# Altium PCB BAILEY.PcbDoc (part 1 of 8)
Units mil, origin at the board's own origin, x right, y up, seen from the top; angles counter-clockwise.
Board outline 4500 x 4000 mil, 4 copper layers (Signal Layer 1, Signal Layer 2, Signal Layer 3, Signal Layer 4), stack 59.904 mil thick; 190 components, 117 nets, 664 pads, 291 vias.
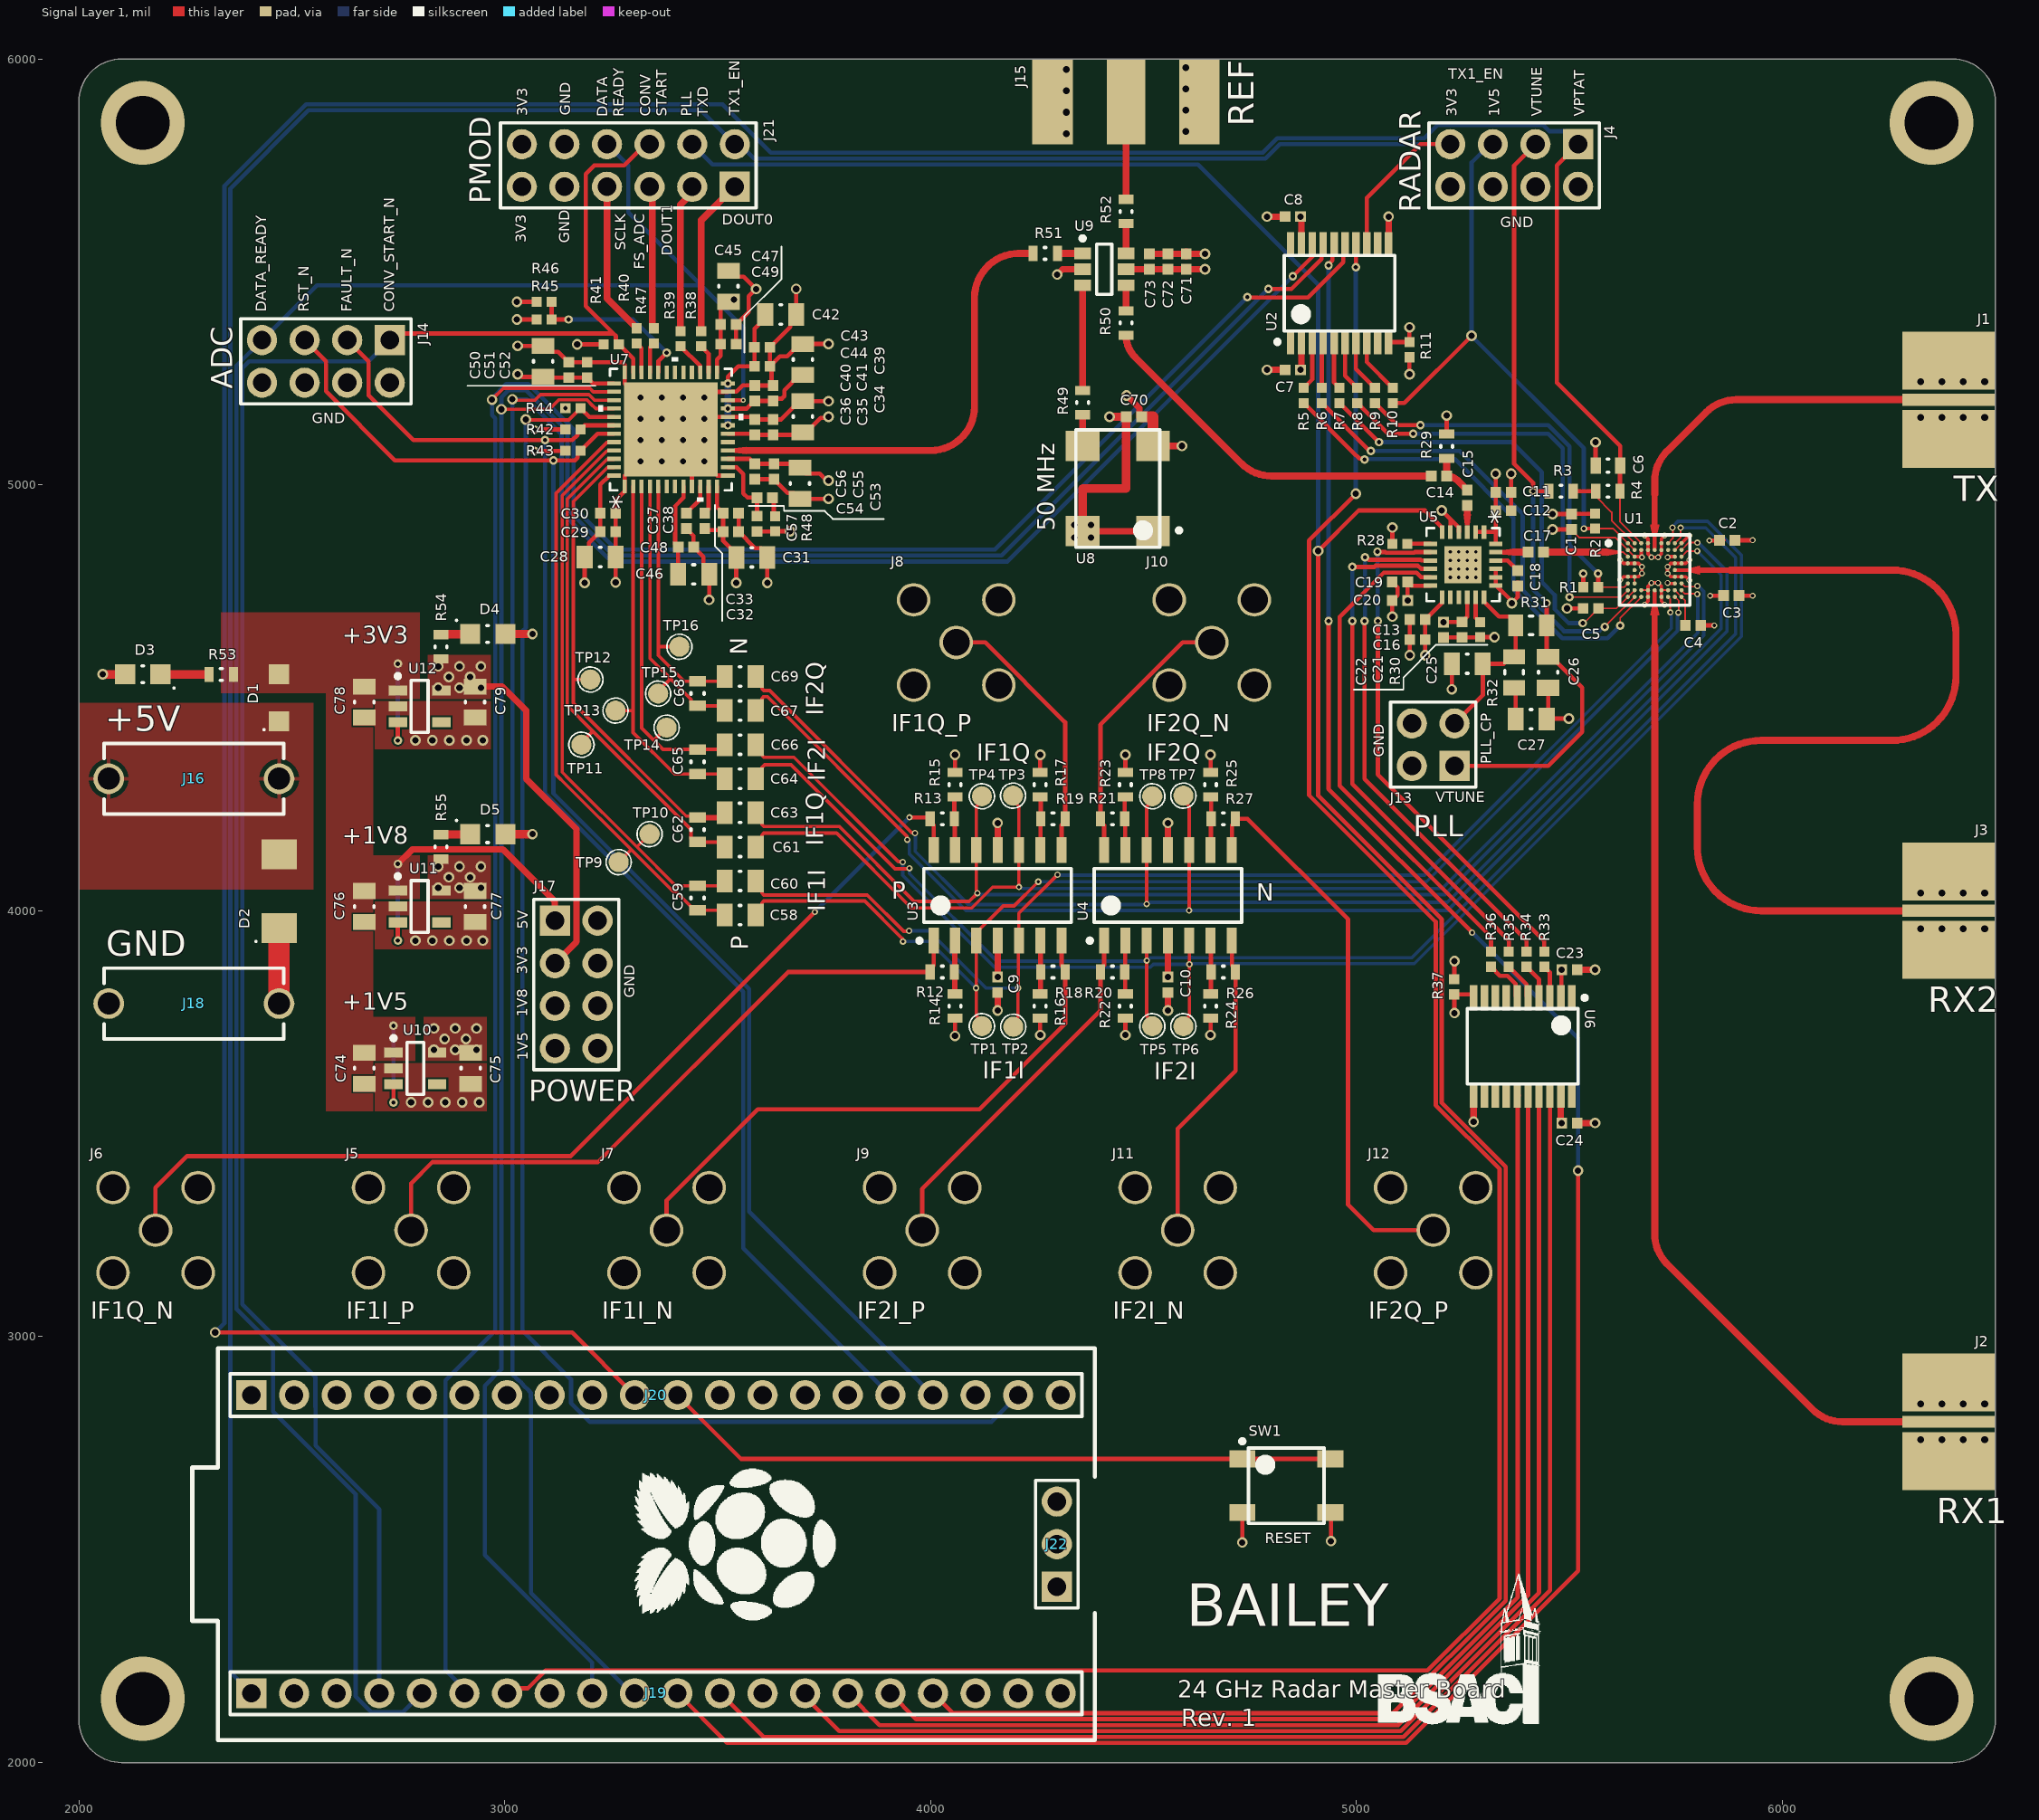
[diagram p0: Signal Layer 1 view]
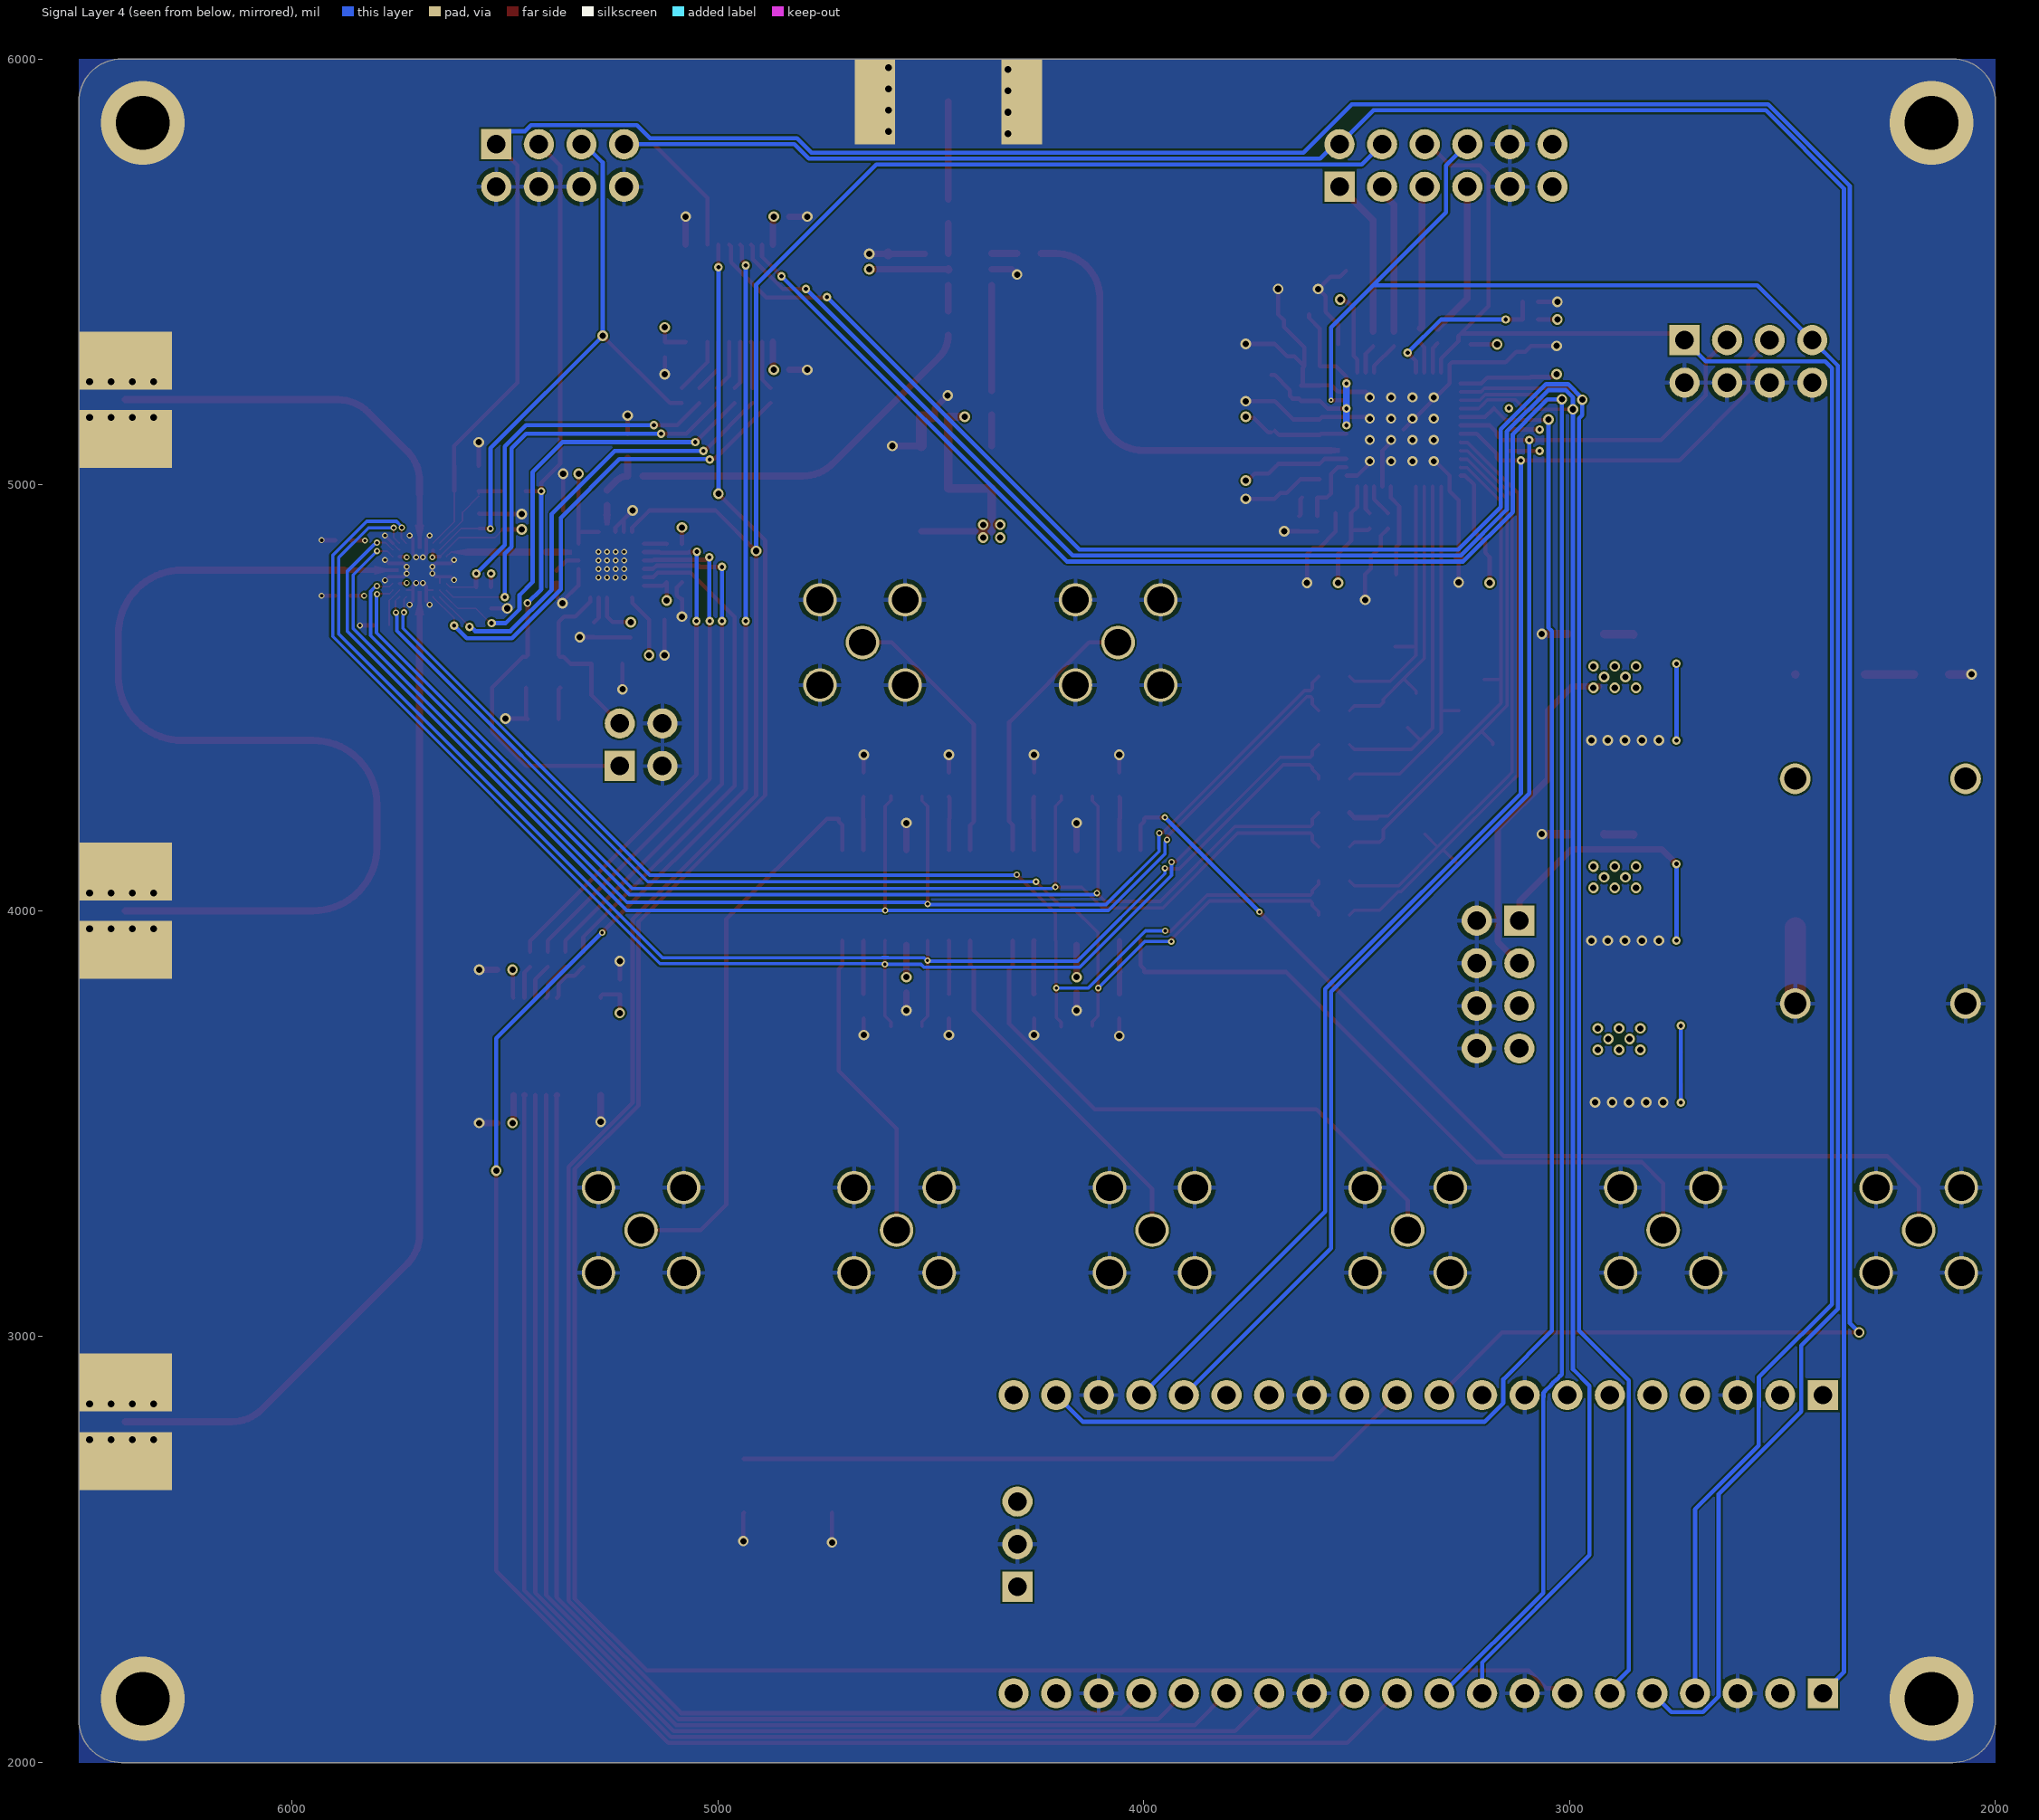
[diagram p1: Signal Layer 4 view, seen from below]
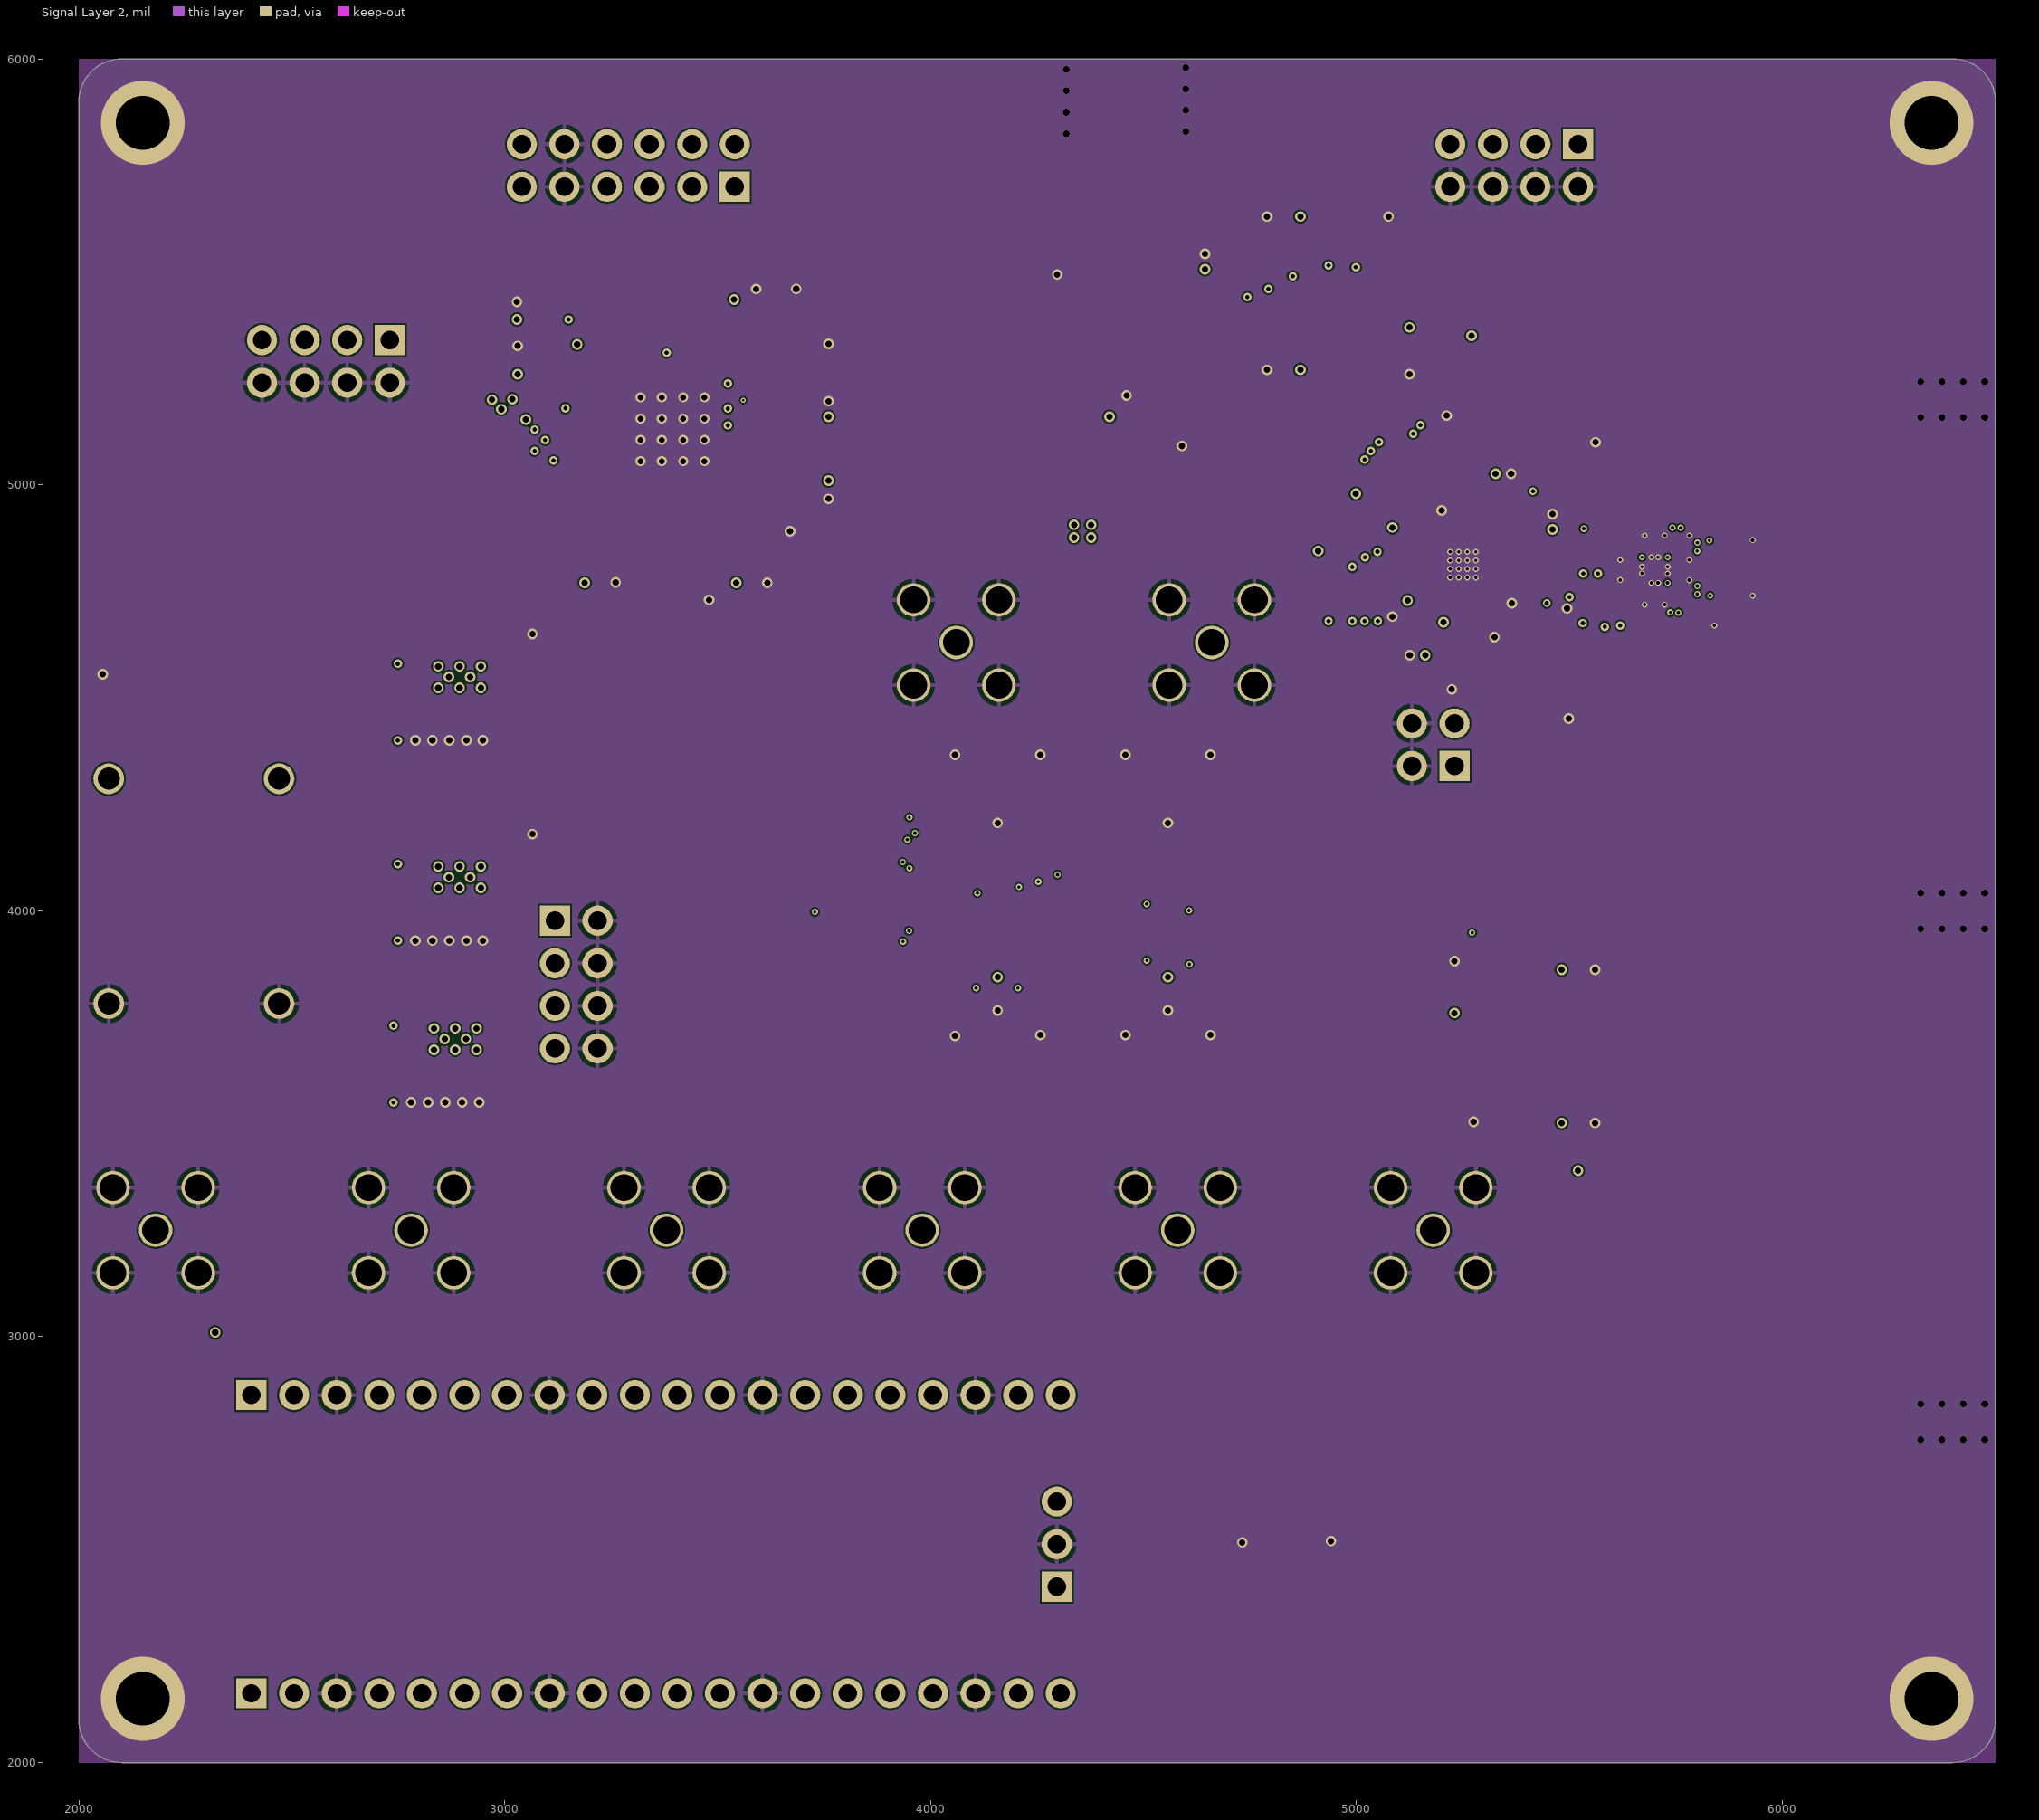
[diagram p2: Signal Layer 2]
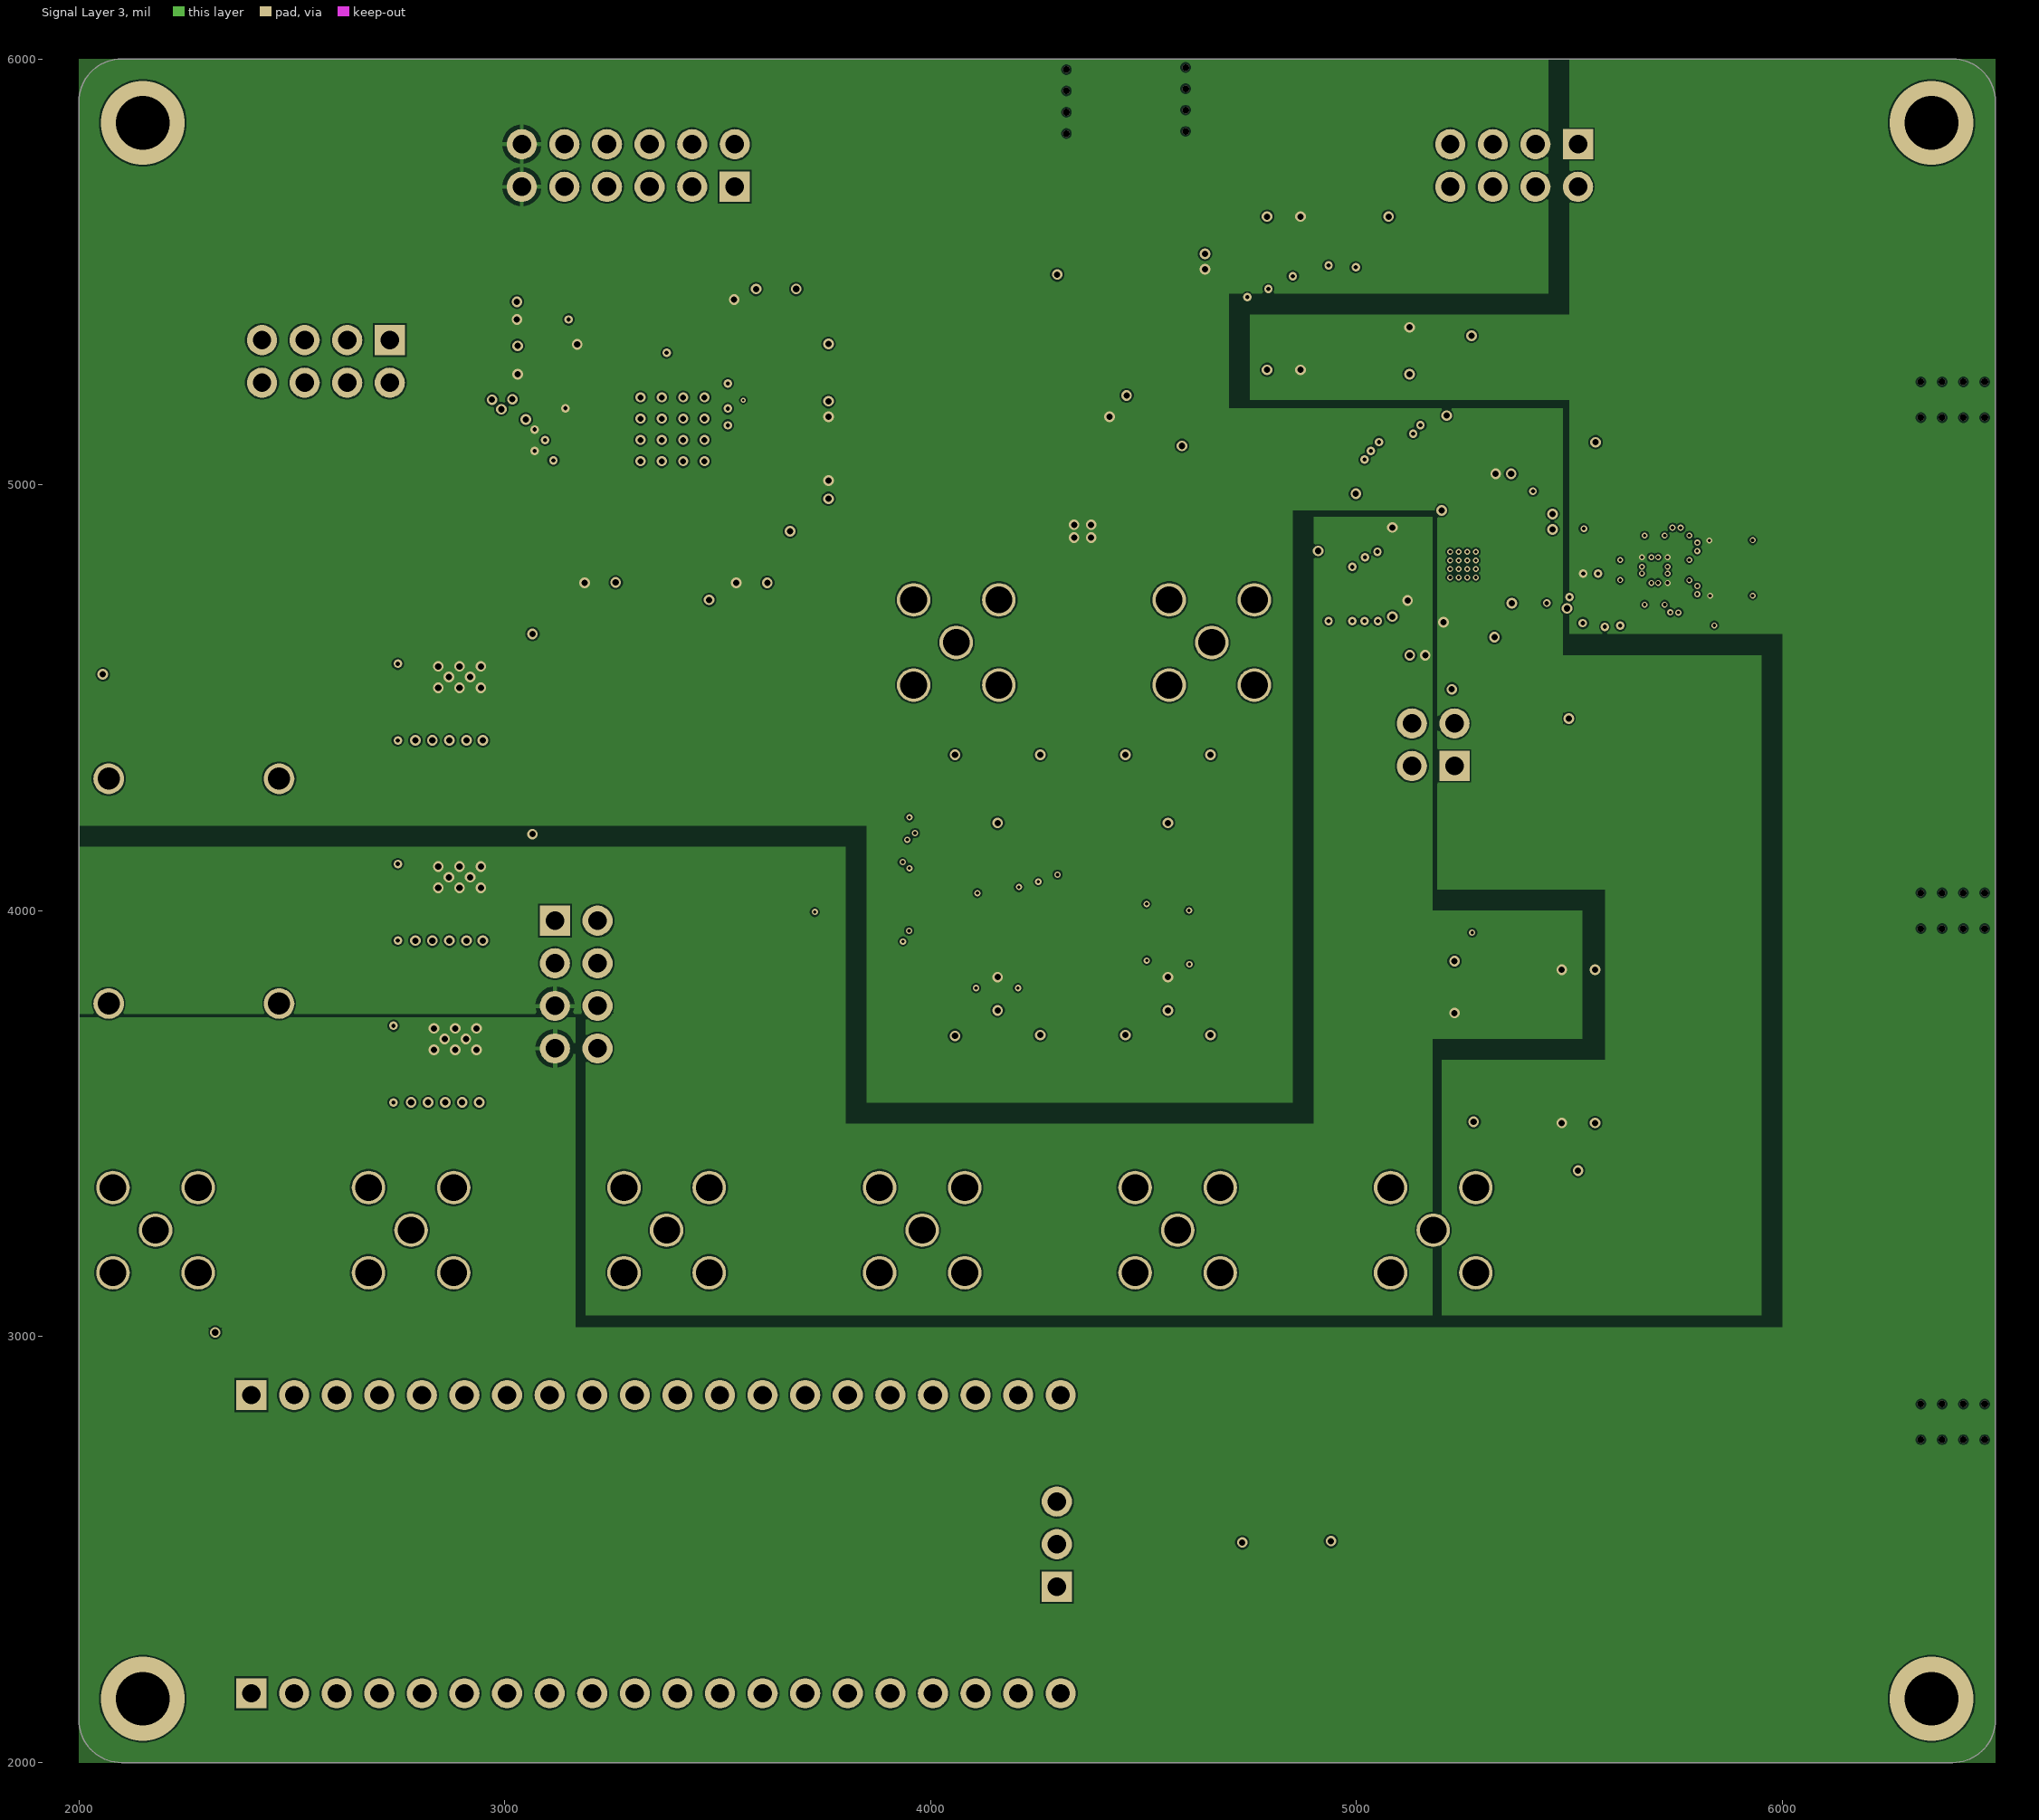
[diagram p3: Signal Layer 3]

## Layer stack, top to bottom
Top Solder: solder mask 0.5, Solder Resist, Dk 3.5
Signal Layer 1: signal copper 1.378
Core 1: core 10, Rogers 4350B 0.010 H1xHH CM 24x18, Dk 3.48
Signal Layer 2: signal copper 1.378
Prepreg 1: prepreg 6.696, Isola FR370HR 1080 18x24 RC71, Dk 3.63
Core 2: core 21, Isola FR370HR 0.021 HHxHH CM 18x24, Dk 4.24
Prepreg 2: prepreg 6.696, Isola FR370HR 1080 18x24 RC71, Dk 3.63
Signal Layer 3: signal copper 1.378
Core 3: core 10, Isola FR370HR 0.010 H1xHH CM 18x24, Dk 4.21
Signal Layer 4: signal copper 1.378
Bottom Solder: solder mask 0.5, Solder Resist, Dk 3.5

## Board outline
2100,2000 cw(c2100,2100) 2000,2100 2000,5900 cw(c2100,5900) 2100,6000 6400,6000 cw(c6400,5900) 6500,5900 6500,2100 cw(c6400,2100) 6400,2000

## Design rules (kind name [scope] priority, off if disabled: settings)
Clearance [All] p1: gap=4 ignorepadtopadclearanceinfootprint=FALSE
DiffPairsRouting [All] p1: maxlimit=10 minlimit=6 mostfreqgap=6 toplayer_minwidth=4 toplayer_maxwidth=50 toplayer_prefwidth=10 midlayer1_minwidth=4 midlayer1_maxwidth=50 midlayer1_prefwidth=10 midlayer2_minwidth=4 midlayer2_maxwidth=50 midlayer2_prefwidth=10 bottomlayer_minwidth=4 bottomlayer_maxwidth=50 bottomlayer_prefwidth=10 maxuncoupledlength=500
HoleSize [All] p1: absolutevalues=TRUE maxlimit=200 minlimit=4 maxpercent=80.000 minpercent=20.000
MatchedLengths "Schematic Matched Net Lengths_3" [InNetClass('RADAR_TX')] p1: tolerance=1 checknetsindiffpair=FALSE checkdiffpairvsdiffpair=TRUE checkxsignals=TRUE checkothers=TRUE
MatchedLengths "Schematic Matched Net Lengths_2" [InNetClass('RADAR_RX')] p2: tolerance=1 checknetsindiffpair=FALSE checkdiffpairvsdiffpair=TRUE checkxsignals=TRUE checkothers=TRUE
PolygonConnect [All] p1: thpad.connectstyle=Relief thpad.reliefconductorwidth=10 thpad.reliefentries=4 thpad.polygonreliefangle="90 Angle" thpad.airgapwidth=10 smdpad.connectstyle=Direct smdpad.reliefconductorwidth=10 smdpad.reliefentries=4 smdpad.polygonreliefangle="90 Angle" smdpad.airgapwidth=10 via.connectstyle=Direct via.reliefconductorwidth=10 via.reliefentries=4 via.polygonreliefangle="90 Angle" via.airgapwidth=10
RoutingVias [All] p1: holewidth=15 width=25 viastyle="Through Hole" minholewidth=6 minwidth=11 maxholewidth=28 maxwidth=50
SolderMaskExpansion [All] p1: expansion=4 istentingtop=FALSE
SupplyNets "Schematic Supply Nets_4" [InNet('5V_IN')] p1: voltage=5.000
SupplyNets "Schematic Supply Nets_3" [InNet('AVDD')] p2: voltage=3.300
SupplyNets "Schematic Supply Nets_2" [InNet('1V8')] p3: voltage=1.800
SupplyNets "Schematic Supply Nets_1" [InNet('1V5')] p4: voltage=1.500
SupplyNets "Schematic Supply Nets" [InNet('GND')] p5: voltage=0.000
Width "24 GHz" [InNetClass('50 Ω')] p1: maxlimit=16.65 minlimit=10 preferedwidth=10 toplayer_minwidth=16.65 toplayer_prefwidth=16.65 impedanceprofiledriven=TRUE impedanceprofileid={7CA07C4F-A242-45EC-9ED5-0CAFCA08DAE7} impedanceprofilevalue=50.000000 minimp=50.000000 maximp=50.000000 favimp=50.000000
Width [All] p2: maxlimit=50 minlimit=4 preferedwidth=10 minimp=50.000000 maximp=50.000000 favimp=50.000000
28 further rules are at their usual default settings.

## Classes and differential pairs
net class RADAR_TX: RADAR_TX1_1
net class RADAR_RX: RADAR_RX1_1 RADAR_RX2_1
net class "50 Ω": ADC_DOUT0 ADC_DOUT1 ADC_FS_ADC ADC_MCLKIN ADC_SCLK NetJ15_1 NetR49_2 PLL_REFIN RADAR_LO_DIV RADAR_RX1_1 RADAR_RX2_1 RADAR_TX1_1
component class RADAR: C1 C2 C3 C4 C5 C6 C7 C8 J1 J2 J3 J4 R1 R2 R3 R4 R5 R6 R7 R8 R9 R10 R11 U1 U2
component class POWER: C74 C75 C76 C77 C78 C79 D1 D2 D3 D4 D5 J16 J17 J18 R53 R54 R55 U10 U11 U12
component class PLL: C11 C12 C13 C14 C15 C16 C17 C18 C19 C20 C21 C22 C23 C24 C25 C26 C27 J13 R28 R29 R30 R31 R32 R33 R34 R35 R36 R37 U5 U6
component class OSC: C70 C71 C72 C73 J15 R49 R50 R51 R52 U8 U9
component class MCU: J19 J20 J21 J22 SW1
component class IF: C9 C10 J5 J6 J7 J8 J9 J10 J11 J12 R12 R13 R14 R15 R16 R17 R18 R19 R20 R21 R22 R23 R24 R25 R26 R27 TP1 TP2 TP3 TP4 TP5 TP6 TP7 TP8 U3 U4
component class ADC: C28 C29 C30 C31 C32 C33 C34 C35 C36 C37 C38 C39 C40 C41 C42 C43 C44 C45 C46 C47 C48 C49 C50 C51 C52 C53 C54 C55 C56 C57 C58 C59 C60 C61 C62 C63 C64 C65 C66 C67 C68 C69 J14 R38 R39 R40 R41 R42 R43 R44 R45 R46 R47 R48 TP9 TP10 TP11 TP12 TP13 TP14 TP15 TP16 U7
differential pair RADAR_IF2Q_4: +RADAR_IF2Q_4_P -RADAR_IF2Q_4_N
differential pair RADAR_IF2Q: +RADAR_IF2Q_P -RADAR_IF2Q_N
differential pair RADAR_IF2I_4: +RADAR_IF2I_4_P -RADAR_IF2I_4_N
differential pair RADAR_IF2I: +RADAR_IF2I_P -RADAR_IF2I_N
differential pair RADAR_IF1Q_4: +RADAR_IF1Q_4_P -RADAR_IF1Q_4_N
differential pair RADAR_IF1Q: +RADAR_IF1Q_P -RADAR_IF1Q_N
differential pair RADAR_IF1I_4: +RADAR_IF1I_4_P -RADAR_IF1I_4_N
differential pair RADAR_IF1I: +RADAR_IF1I_P -RADAR_IF1I_N

## Components (designator, comment, footprint, x,y, rotation, side; value= is the part's Value field where it differs from the comment)
C1 "100 nF" CAP_0402 5504.56,4913.57 r270 top value=100nF
C2 "100 nF" CAP_0402 5870,4870 r180 top value=100nF
C3 "100 nF" CAP_0402 5880,4740 r180 top value=100nF
C4 "100 nF" CAP_0402 5790,4670 r180 top value=100nF
C5 "100 nF" CAP_0402 5550,4710 r0 top value=100nF
C6 "1 uF" CAP_0603 5590,5045 r0 top value=1µF
C7 "100 nF" CAP_0402 4850,5270 r180 top value=100nF
C8 "100 nF" CAP_0402 4850,5630 r0 top value=100nF
C9 "100 nF" CAP_0402 4157.16,3826.12 r270 top value=100nF
C10 "100 nF" CAP_0402 4557.16,3826.12 r270 top value=100nF
C11 "100 nF" CAP_0402 5344.88,4982.76 r180 top value=100nF
C12 "10 pF" CAP_0402 5344.88,4939.56 r180 top value=10pF
C13 "100 nF" CAP_0402 5143.09,4683.71 r0 top value=100nF
C14 "1 nF" CAP_0402 5193.42,5020.82 r180 top value=1nF
C15 "1 nF" CAP_0402 5259.84,4969.78 r90 top value=1nF
C16 "10 pF" CAP_0402 5143.09,4636.8 r0 top value=10pF
C17 "10 nF" CAP_0402 5420.93,4842.07 r0 top value=10nF
C18 "100 pF" CAP_0402 5378.49,4780.76 r270 top value=100pF
C19 "100 nF" CAP_0402 5101.72,4771.86 r0 top value=100nF
C20 "10 pF" CAP_0402 5101.72,4728.66 r0 top value=10pF
C21 "100 nF" CAP_0402 5247.59,4660 r90 top value=100nF
C22 "10 pF" CAP_0402 5204.39,4659.7 r90 top value=10pF
C23 "100 nF" CAP_0402 5500,3861.68 r0 top value=100nF
C24 "100 nF" CAP_0402 5500,3501.68 r180 top value=100nF
C25 "745 pF" CAP_0805 5260,4580 r180 top value=750pF
C26 "NP" CAP_0805 5450,4560 r270 top
C27 "14.4 nF" CAP_0805 5410,4450 r0 top value=15nF
C28 "10 uF" CAP_0805 3223.9,4830.46 r180 top value=10µF
C29 "100 nF" CAP_0402 3242.2,4890.41 r180 top value=100nF
C30 "1 nF" CAP_0402 3242.2,4933.61 r180 top value=1nF
C31 "10 uF" CAP_0805 3580,4830 r180 top value=10µF
C32 "100 nF" CAP_0402 3530.95,4890.41 r180 top value=100nF
C33 "1 nF" CAP_0402 3530.95,4933.61 r180 top value=1nF
C34 "10 uF" CAP_0805 3700,5160 r270 top value=10µF
C35 "100 nF" CAP_0402 3630.12,5135.5 r270 top value=100nF
C36 "1 nF" CAP_0402 3586.92,5135.5 r270 top value=1nF
C37 "0.47 uF" CAP_0402 3426.45,4915.5 r90 top value=470nF
C38 "0.47 uF" CAP_0402 3469.65,4915.5 r90 top value=470nF
C39 "10 uF" CAP_0805 3700,5294.41 r270 top value=10µF
C40 "100 nF" CAP_0402 3586.76,5215.49 r270 top value=100nF
C41 "1 nF" CAP_0402 3629.96,5214.91 r270 top value=1nF
C42 "10 uF" CAP_0805 3647.86,5400.04 r180 top value=10µF
C43 "100 nF" CAP_0402 3604.41,5323.07 r180 top value=100nF
C44 "1 nF" CAP_0402 3604.5,5278.48 r180 top value=1nF
C45 "10 uF" CAP_0805 3524.99,5466.13 r270 top value=10µF
C46 "10 uF" CAP_0805 3443.53,4790 r180 top value=10µF
C47 "100 nF" CAP_0402 3524.99,5376.53 r180 top value=100nF
C48 "100 nF" CAP_0402 3425.22,4854.19 r180 top value=100nF
C49 "1 nF" CAP_0402 3524.99,5330.48 r180 top value=1nF
C50 "10 uF" CAP_0805 3090,5290 r270 top value=10µF
C51 "100 nF" CAP_0402 3150,5270 r270 top value=100nF
C52 "1 nF" CAP_0402 3193.2,5270 r270 top value=1nF
C53 "10 uF" CAP_0805 3692.84,5003.64 r90 top value=10µF
C54 "5.6 nF" CAP_0402 3610.07,4970 r180 top value=5.6nF
C55 "100 nF" CAP_0402 3632.03,5031.31 r90 top value=100nF
C56 "1 nF" CAP_0402 3586.83,5031.31 r90 top value=1nF
C57 "390 pF" CAP_0402 3592.26,4908.69 r90 top value=390pF
C58 "10 uF" CAP_0805 3552.67,3990 r180 top value=10µF
C59 "200 pF" CAP_0603 3452.67,4030 r270 top value=200pF
C60 "10 uF" CAP_0805 3552.67,4070 r180 top value=10µF
C61 "10 uF" CAP_0805 3552.67,4150 r180 top value=10µF
C62 "200 pF" CAP_0603 3452.67,4190 r270 top value=200pF
C63 "10 uF" CAP_0805 3552.67,4230 r180 top value=10µF
C64 "10 uF" CAP_0805 3552.67,4310 r180 top value=10µF
C65 "200 pF" CAP_0603 3452.67,4350 r270 top value=200pF
C66 "10 uF" CAP_0805 3552.67,4390 r180 top value=10µF
C67 "10 uF" CAP_0805 3552.67,4470 r180 top value=10µF
C68 "200 pF" CAP_0603 3452.67,4510 r270 top value=200pF
C69 "10 uF" CAP_0805 3552.67,4550 r180 top value=10µF
C70 "100 nF" CAP_0402 4477.2,5159.8 r180 top value=100nF
C71 "100 nF" CAP_0402 4600.18,5524.25 r270 top value=100nF
C72 "10 nF" CAP_0402 4556.98,5524.25 r270 top value=10nF
C73 "10 pF" CAP_0402 4513.79,5524.25 r270 top value=10pF
C74 "1 uF" CAP_0805 2670,3630 r90 top value=1µF
C75 "1 uF" CAP_0805 2920,3630 r90 top value=1µF
C76 "1 uF" CAP_0805 2670,4010 r90 top value=1µF
C77 "1 uF" CAP_0805 2930,4010 r90 top value=1µF
C78 "1 uF" CAP_0805 2670,4490 r90 top value=1µF
C79 "1 uF" CAP_0805 2930,4490 r90 top value=1µF
D1 "CRS08" CRS08 2470,4500 r90 top value=90pF
D2 "SMAJ6.0A" SMAJ 2470,4046 r90 top
D3 "CTL0805FRD1T" CTL0805FRD1T 2150,4555.12 r180 top
D4 "CTL0805FRD1T" CTL0805FRD1T 2960,4650 r0 top
D5 "CTL0805FRD1T" CTL0805FRD1T 2960,4180 r0 top
J1 "901-10513-2" 901-10513-2 6500,5200 r180 top
J2 "901-10513-2" 901-10513-2 6500,2800 r180 top
J3 "901-10513-2" 901-10513-2 6500,4000 r180 top
J4 "Header" CONN_2x4_2.54mm_PinHeader_Vertical 5520,5800 r270 top
J5 "CONN_RF_SMA" SMA-J-P-H-ST-TH1 2780,3250 r270 top
J6 "CONN_RF_SMA" SMA-J-P-H-ST-TH1 2180,3250 r270 top
J7 "CONN_RF_SMA" SMA-J-P-H-ST-TH1 3380,3250 r270 top
J8 "CONN_RF_SMA" SMA-J-P-H-ST-TH1 4060,4630 r270 top
J9 "CONN_RF_SMA" SMA-J-P-H-ST-TH1 3980,3250 r270 top
J10 "CONN_RF_SMA" SMA-J-P-H-ST-TH1 4660,4630 r270 top
J11 "CONN_RF_SMA" SMA-J-P-H-ST-TH1 4580,3250 r270 top
J12 "CONN_RF_SMA" SMA-J-P-H-ST-TH1 5180,3250 r270 top
J13 "Header" CONN_2x2_2.54mm_PinHeader_Vertical 5230,4340 r180 top
J14 "Header" CONN_2x4_2.54mm_PinHeader_Vertical 2730,5340 r270 top
J15 "CONN_RF_SMA" 142-0701-801 4458.7,5900 r270 top
J16 "105-0752-001" CONN_BANANA_JACK 2070,4310 r0 top
J17 "Header" CONN_2x4_2.54mm_PinHeader_Vertical 3117.79,3976.82 r0 top
J18 "105-0753-001" CONN_BANANA_JACK 2070,3782 r0 top
J19 "Header" CONN_1x20_2.54mm_PinSocket_Vertical 2405.31,2162.69 r90 top
J20 "Header" CONN_1x20_2.54mm_PinSocket_Vertical 2405.31,2862.69 r90 top
J21 "Header" CONN_2x6_2.54mm_PinHeader_Horizontal 3540,5700 r270 top
J22 "Header" CONN_1x3_2.54mm_PinSocket_Vertical 4296.25,2412.69 r180 top
R1 "10 kΩ" RES_0402 5550,4760 r180 top value=10kΩ
R2 "10 kΩ" RES_0402 5560,4915 r270 top value=10kΩ
R3 "0 Ω" RES_0603 5480,4985 r180 top value=0Ω
R4 "NP" RES_0603 5590,4985 r180 top
R5 "100 Ω" RES_0402 4876,5209.87 r270 top value=100Ω
R6 "100 Ω" RES_0402 4918.41,5209.87 r270 top value=100Ω
R7 "100 Ω" RES_0402 4960.03,5209.87 r270 top value=100Ω
R8 "100 Ω" RES_0402 5001.65,5209.87 r270 top value=100Ω
R9 "100 Ω" RES_0402 5043.28,5209.87 r270 top value=100Ω
R10 "100 Ω" RES_0402 5084.9,5209.87 r270 top value=100Ω
R11 "10 kΩ" RES_0402 5124.19,5317.32 r270 top value=10kΩ
R12 "200 Ω" RES_0603 4027.16,3856.12 r180 top value=200Ω
R13 "200 Ω" RES_0603 4027.16,4216.12 r180 top value=200Ω
R14 "NP" RES_0603 4057.16,3776.12 r270 top
R15 "NP" RES_0603 4057.16,4296.12 r90 top
R16 "NP" RES_0603 4257.16,3776.12 r270 top
R17 "NP" RES_0603 4257.16,4296.12 r90 top
R18 "200 Ω" RES_0603 4287.16,3856.12 r0 top value=200Ω
R19 "200 Ω" RES_0603 4287.16,4216.12 r0 top value=200Ω
R20 "200 Ω" RES_0603 4427.16,3856.12 r180 top value=200Ω
R21 "200 Ω" RES_0603 4427.16,4216.12 r180 top value=200Ω
R22 "NP" RES_0603 4457.16,3776.12 r270 top
R23 "NP" RES_0603 4457.16,4296.12 r90 top
R24 "NP" RES_0603 4657.16,3776.12 r270 top
R25 "NP" RES_0603 4657.16,4296.12 r90 top
R26 "200 Ω" RES_0603 4687.16,3856.12 r0 top value=200Ω
R27 "200 Ω" RES_0603 4687.16,4216.12 r0 top value=200Ω
R28 "10 kΩ" RES_0402 5101.72,4861.47 r180 top value=10kΩ
R29 "49.9 Ω" RES_0603 5211.53,5090.79 r270 top value=49.9Ω
R30 "5.1 kΩ" RES_0402 5290,4660 r270 top value=5.1kΩ
R31 "0 Ω" RES_0805 5410,4670 r180 top value=0Ω
R32 "199 Ω" RES_0805 5370,4560 r270 top value=200Ω
R33 "100 Ω" RES_0402 5440.66,3886.07 r90 top value=100Ω
R34 "100 Ω" RES_0402 5399.04,3886.07 r90 top value=100Ω
R35 "100 Ω" RES_0402 5357.42,3886.07 r90 top value=100Ω
R36 "100 Ω" RES_0402 5315.8,3886.07 r90 top value=100Ω
R37 "10 kΩ" RES_0402 5229.15,3821.29 r90 top value=10kΩ
R38 "33 Ω" RES_0402 3461.14,5343.32 r90 top value=33Ω
R39 "33 Ω" RES_0402 3412.37,5343.32 r90 top value=33Ω
R40 "33 Ω" RES_0402 3310,5350 r90 top value=33Ω
R41 "10 kΩ" RES_0402 3250,5330 r180 top value=10kΩ
R42 "10 kΩ" RES_0402 3160,5130 r180 top value=10kΩ
R43 "10 kΩ" RES_0402 3160,5080 r180 top value=10kΩ
R44 "10 kΩ" RES_0402 3160,5180 r180 top value=10kΩ
R45 "NP" RES_0402 3092.28,5388.38 r180 top
R46 "10 kΩ" RES_0402 3092.28,5430 r180 top value=10kΩ
R47 "33 Ω" RES_0402 3350,5350 r270 top value=33Ω
R48 "1 kΩ" RES_0402 3634.67,4908.69 r90 top value=1kΩ
R49 "33 Ω" RES_0603 4356.73,5193.13 r90 top value=33Ω
R50 "33 Ω" RES_0603 4458.7,5380 r270 top value=33Ω
R51 "33 Ω" RES_0603 4268.98,5543.54 r180 top value=33Ω
R52 "33 Ω" RES_0603 4458.7,5641.99 r90 top value=33Ω
R53 "2 kΩ" RES_0603 2334.29,4555.12 r180 top value=2kΩ
R54 "1 kΩ" RES_0603 2850,4620 r90 top value=1kΩ
R55 "178 Ω" RES_0603 2850,4150 r90 top value=178Ω
SW1 "Y97KT23B2NAFP" PTS647 4834.95,2650 r0 top
TP1 "TEST_POINT" TEST_POINT 4120.37,3729.07 r0 top
TP2 "TEST_POINT" TEST_POINT 4193.95,3727.77 r0 top
TP3 "TEST_POINT" TEST_POINT 4193.36,4270.26 r0 top
TP4 "TEST_POINT" TEST_POINT 4120.37,4268.84 r0 top
TP5 "TEST_POINT" TEST_POINT 4520.37,3728.85 r0 top
TP6 "TEST_POINT" TEST_POINT 4593.36,3728.85 r0 top
TP7 "TEST_POINT" TEST_POINT 4593.36,4270.26 r0 top
TP8 "TEST_POINT" TEST_POINT 4520.37,4268.84 r0 top
TP9 "TEST_POINT" TEST_POINT 3267.4,4114.23 r0 top
TP10 "TEST_POINT" TEST_POINT 3340,4180 r0 top
TP11 "TEST_POINT" TEST_POINT 3180,4390 r0 top
TP12 "TEST_POINT" TEST_POINT 3201,4542.99 r0 top
TP13 "TEST_POINT" TEST_POINT 3260,4470 r0 top
TP14 "TEST_POINT" TEST_POINT 3380,4430 r0 top
TP15 "TEST_POINT" TEST_POINT 3360,4510 r0 top
TP16 "TEST_POINT" TEST_POINT 3410,4620 r0 top
U1 "BGT24LTR22" BGA52C40P9X9_363X363X80-V 5700,4800 r0 top locked
U2 "TXB0108PWR" TXB0108PWR 4960,5450 r90 top
U3 "TLV9064IDR" TLV9064IDR 4157.16,4036.12 r90 top
U4 "TLV9064IDR" TLV9064IDR 4557.16,4036.12 r90 top
U5 "ADF4159CCPZ" CP_24_10_ADI 5250,4812.55 r270 top locked
U6 "TXB0108PWR" TXB0108PWR 5390,3681.68 r270 top
U7 "ADAR7251WBCSZ" CS_48_1_ADI 3390,5130 r90 top
U8 "CWX813-050.0M" CWX8XX 4439.41,4991.47 r90 top
U9 "PL133-37T" PL133-37T 4407.72,5506.14 r0 top
U10 "TLV75715PDBVR" TLV757XXPDBVR 2790,3630 r0 top
U11 "TLV75718PDBVR" TLV757XXPDBVR 2800,4010 r0 top
U12 "TLV75733PDBVR" TLV757XXPDBVR 2800,4480 r0 top

## Footprints (in the part's own frame and the unit in brackets; to place one, negate y for a bottom-side part, rotate by r counter-clockwise, add the part's x,y. Pads: shape width x height; smd on the part's side, far side on the other; paste and mask are expansions set on the pad)
142-0701-801 [mil] "Connector RF SMA Edge Launch"
  rect 200x90 smd: 1(0,0)
  rect 200x95 smd: 2(0,172.5) 2(0,-172.5)
  rect 200x95 smd far side: 2(0,172.5) 2(0,-172.5)
  body extent -475,-188 87,188, height 156
901-10513-2 [mm] "SMA PCB End Launch Straight Jack 50 Ohm 0.062 High Frequency"
  rect 5.54x0.72 smd: 1(2.77,0)
  rect 5.54x3.45 smd: 2(2.77,2.34) 2(2.77,-2.34)
  rect 5.54x3.45 smd far side: 2(2.77,2.34) 2(2.77,-2.34)
  body extent -9.53,-3.14 4.55,3.14, height 3.28
BGA52C40P9X9_363X363X80-V [mm] "BGA,0.40mm pitch,square;52 pin,9 columns X 9 rows,3.63mm X 3.63mm X 0.80mm H"
  round 0.25 smd paste+0 mask+0: A1(-1.6,1.6) A2(-1.2,1.6) A3(-0.8,1.6) A4(-0.4,1.6) A6(0.4,1.6) A7(0.8,1.6) A8(1.2,1.6) A9(1.6,1.6) B1(-1.6,1.2) B2(-1.2,1.2) B3(-0.8,1.2) B4(-0.4,1.2) B5(0,1.2) B6(0.4,1.2) B7(0.8,1.2) B8(1.2,1.2) B9(1.6,1.2) C1(-1.6,0.8) C2(-1.2,0.8) C8(1.2,0.8) C9(1.6,0.8) D1(-1.6,0.4) D2(-1.2,0.4) D8(1.2,0.4) D9(1.6,0.4) E2(-1.2,0) E8(1.2,0) F1(-1.6,-0.4) F2(-1.2,-0.4) F8(1.2,-0.4) F9(1.6,-0.4) G1(-1.6,-0.8) G2(-1.2,-0.8) G8(1.2,-0.8) G9(1.6,-0.8) H1(-1.6,-1.2) H2(-1.2,-1.2) H3(-0.8,-1.2) H4(-0.4,-1.2) H5(0,-1.2) H6(0.4,-1.2) H7(0.8,-1.2) H8(1.2,-1.2) H9(1.6,-1.2) J1(-1.6,-1.6) J2(-1.2,-1.6) J3(-0.8,-1.6) J4(-0.4,-1.6) J6(0.4,-1.6) J7(0.8,-1.6) J8(1.2,-1.6) J9(1.6,-1.6)
  silkscreen extent -2.87,-2.1 2.1,2.1, body extent -1.8,-1.8 1.8,1.8, height 0.81
CAP_0402 [mm] "Chip Capacitor, 2-Leads, Body 1.00x0.50mm, IPC Medium Density"
  rect 0.64x0.64 smd: 1(-0.46,0) 2(0.46,0)
  body extent -0.55,-0.3 0.55,0.3, height 0.6
CAP_0603 [mm] "Chip Capacitor, 2-Leads, Body 1.55x0.85mm, IPC Medium Density"
  rect 0.62x0.98 smd: 1(-0.73,0) 2(0.73,0)
  silkscreen extent -0.05,-0.39 0.05,0.39, body extent -0.8,-0.45 0.8,0.45, height 0.5
CAP_0805 [mm] "Chip Capacitor, 2-Leads, Body 2.00x1.25mm, IPC Medium Density"
  rect 0.95x1.35 smd: 1(-0.925,0) 2(0.925,0)
  silkscreen extent -0.05,-0.58 0.05,0.58, body extent -1.02,-0.65 1.02,0.65, height 0.5
CONN_1x3_2.54mm_PinSocket_Vertical [mm] "1x3 2.54mm Vertical Pin Socket"
  rect 1.8x1.8 hole 1.1: 1(0,0)
  round 1.8 hole 1.1: 2(0,-2.54) 3(0,-5.08)
  silkscreen extent -1.27,-6.35 1.27,1.27, body extent -1.3,-6.35 1.24,1.27, height 8.5
CONN_1x20_2.54mm_PinSocket_Vertical [mm] "1x20 2.54mm Vertical Pin Socket"
  rect 1.8x1.8 hole 1.1: 1(0,0)
  round 1.8 hole 1.1: 2(0,-2.54) 3(0,-5.08) 4(0,-7.62) 5(0,-10.16) 6(0,-12.7) 7(0,-15.24) 8(0,-17.78) 9(0,-20.32) 10(0,-22.86) 11(0,-25.4) 12(0,-27.94) 13(0,-30.48) 14(0,-33.02) 15(0,-35.56) 16(0,-38.1) 17(0,-40.64) 18(0,-43.18) 19(0,-45.72) 20(0,-48.26)
  silkscreen extent -1.27,-49.53 1.27,1.27, body extent -1.27,-49.53 1.27,1.27, height 8.5
CONN_2x2_2.54mm_PinHeader_Vertical [mm] "2x2 2.54mm Vertical Pin Header"
  rect 1.8x1.8 hole 1.1: 1(0,0)
  round 1.8 hole 1.1: 2(0,-2.54) 3(2.54,0) 4(2.54,-2.54)
  silkscreen extent -1.27,-3.81 3.81,1.27, body extent -1.27,-3.81 3.81,1.27, height 9.5
CONN_2x4_2.54mm_PinHeader_Vertical [mm] "2x4 2.54mm Vertical Pin Header"
  rect 1.8x1.8 hole 1.1: 1(0,0)
  round 1.8 hole 1.1: 2(0,-2.54) 3(0,-5.08) 4(0,-7.62) 5(2.54,0) 6(2.54,-2.54) 7(2.54,-5.08) 8(2.54,-7.62)
  silkscreen extent -1.27,-8.89 3.81,1.27, body extent -1.27,-8.89 3.81,1.27, height 9.5
CONN_2x6_2.54mm_PinHeader_Horizontal [mm] "2x6 2.54mm Horizontal Pin Header"
  rect 1.8x1.8 hole 1.1: 1(0,0)
  round 1.8 hole 1.1: 2(0,-2.54) 3(0,-5.08) 4(0,-7.62) 5(0,-10.16) 6(0,-12.7) 7(-2.54,0) 8(-2.54,-2.54) 9(-2.54,-5.08) 10(-2.54,-7.62) 11(-2.54,-10.16) 12(-2.54,-12.7)
  silkscreen extent -3.81,-13.97 1.27,1.27, body extent -12.45,-13.97 0.38,1.27, height 5.08
CONN_BANANA_JACK [mil] "Banana Jack Connector Standard Tip Solder"
  round 72 hole 52: 1(0,0) 2(400,0)
  silkscreen extent -11,-83 411,83, body extent -9,-78 409,78, height 203
CP_24_10_ADI [mm]
  rect 0.275x0.8 smd paste+0 mask+0: 1(1.25,1.95) 2(0.75,1.95) 3(0.25,1.95) 4(-0.25,1.95) 5(-0.75,1.95) 6(-1.25,1.95) 13(-1.25,-1.95) 14(-0.75,-1.95) 15(-0.25,-1.95) 16(0.25,-1.95) 17(0.75,-1.95) 18(1.25,-1.95)
  rect 0.8x0.275 smd paste+0 mask+0: 7(-1.95,1.25) 8(-1.95,0.75) 9(-1.95,0.25) 10(-1.95,-0.25) 11(-1.95,-0.75) 12(-1.95,-1.25) 19(1.95,-1.25) 20(1.95,-0.75) 21(1.95,-0.25) 22(1.95,0.25) 23(1.95,0.75) 24(1.95,1.25)
  rect 2.2x2.2 smd paste+0 mask+0: HTAB(0,0)
  silkscreen extent -2.18,-2.18 2.18,2.18, body extent -2.05,-2.05 2.05,2.05, height 0.6
CRS08 [mm] "SODFL, 2-Leads, Body 1.65x3.50mm, IPC Medium Density"
  rect 1.2x1.2 smd: 1(-1.4,0) 2(1.4,0)
  silkscreen extent -1.95,0.85 -1.85,0.95, body extent -1.75,-0.9 1.75,0.9, height 0.98
CS_48_1_ADI [mm]
  rect 0.815x0.249 smd paste+0 mask+0: 1(-3.397,2.75) 2(-3.397,2.25) 3(-3.397,1.75) 4(-3.397,1.25) 5(-3.397,0.75) 6(-3.397,0.25) 7(-3.397,-0.25) 8(-3.397,-0.75) 9(-3.397,-1.25) 10(-3.397,-1.75) 11(-3.397,-2.25) 12(-3.397,-2.75) 25(3.397,-2.75) 26(3.397,-2.25) 27(3.397,-1.75) 28(3.397,-1.25) 29(3.397,-0.75) 30(3.397,-0.25) 31(3.397,0.25) 32(3.397,0.75) 33(3.397,1.25) 34(3.397,1.75) 35(3.397,2.25) 36(3.397,2.75)
  rect 0.249x0.815 smd paste+0 mask+0: 13(-2.75,-3.397) 14(-2.25,-3.397) 15(-1.75,-3.397) 16(-1.25,-3.397) 17(-0.75,-3.397) 18(-0.25,-3.397) 19(0.25,-3.397) 20(0.75,-3.397) 21(1.25,-3.397) 22(1.75,-3.397) 23(2.25,-3.397) 24(2.75,-3.397) 37(2.75,3.397) 38(2.25,3.397) 39(1.75,3.397) 40(1.25,3.397) 41(0.75,3.397) 42(0.25,3.397) 43(-0.25,3.397) 44(-0.75,3.397) 45(-1.25,3.397) 46(-1.75,3.397) 47(-2.25,3.397) 48(-2.75,3.397)
  rect 5.6x5.6 smd paste-2.8 mask+0: 49(0,0)
  silkscreen extent -4.31,-4.31 4.31,4.31, body extent -3.5,-3.5 3.5,3.5, height 0.99
CTL0805FRD1T [mm] "Chip Diode, 2-Leads, Body 2.00x1.25mm, IPC Medium Density"
  rect 1.2x1.2 smd: 1(-1.05,0) 2(1.05,0)
  silkscreen extent -1.91,-0.5 0.05,0.86, body extent -1.05,-0.67 1.05,0.67, height 0.9
CWX8XX [mm] "5.0x7.0mm Surface Mount CMOS Clock Oscillator"
  rect 1.8x2 smd: 1(-2.54,-2.1) 2(2.54,-2.1) 3(2.54,2.1) 4(-2.54,2.1)
  silkscreen extent -3.5,-3.78 3.5,2.5, body extent -3.5,-2.5 3.5,2.5, height 1.3
PL133-37T [mm] "Low-Power, 1.62V to 3.63V, 1 MHz to 150 MHz, Inverting 1:3 Fanout Buffer IC"
  rect 0.99x0.69 smd: 1(-1.295,0.95) 2(-1.295,0) 3(-1.295,-0.95) 4(1.295,-0.95) 5(1.295,0) 6(1.295,0.95)
  silkscreen extent -1.42,-1.5 0.45,1.97, body extent -1.5,-1.5 1.5,1.5, height 1.45
PTS647 [mm] "4.5x4.5mm SMT Tactile Switch"
  rect 1.55x1 smd: 1(-2.625,1.6) 2(2.625,1.6) 3(2.625,-1.6) 4(-2.625,-1.6)
  silkscreen extent -2.75,-2.25 2.25,2.77, body extent -2.25,-2.25 2.25,2.25, height 3.8
RES_0402 [mm] "Chip Resistor, 2-Leads, Body 1.00x0.50mm, IPC Medium Density"
  rect 0.6x0.6 smd: 1(-0.45,0) 2(0.45,0)
  body extent -0.55,-0.3 0.55,0.3, height 0.6
RES_0603 [mm] "Chip Resistor, 2-Leads, Body 1.55x0.85mm, IPC Medium Density"
  rect 0.55x0.9 smd: 1(-0.725,0) 2(0.725,0)
  silkscreen extent -0.05,-0.35 0.05,0.35, body extent -0.8,-0.45 0.8,0.45, height 0.5
RES_0805 [mm] "Chip Resistor, 2-Leads, Body 2.00x1.25mm, IPC Medium Density"
  rect 0.9x1.3 smd: 1(-0.925,0) 2(0.925,0)
  silkscreen extent -0.1,-0.55 0.1,0.55, body extent -1.02,-0.65 1.02,0.65, height 0.5
SMA-J-P-H-ST-TH1 [mm] "Connector RF SMA Vertical"
  round 2 hole 1.6: 1(0,0) 2(-2.54,2.54) 2(-2.54,-2.54) 2(2.54,2.54) 2(2.54,-2.54)
  body extent -3.18,-3.17 3.17,3.17, height 9.99
SMAJ [mm] "TVS Diode Surface Mount DO-214AC"
  rect 1.8x2.1 smd: 1(-2.2,0) 2(2.2,0)
  silkscreen extent -3.05,1.33 -2.95,1.42, body extent -2.64,-1.4 2.64,1.4, height 2.34
TEST_POINT [mm] "Test Point Pad"
  round 1.2 smd paste-0.6: 1(0,0)
  silkscreen extent -0.75,-0.75 0.75,0.75, body extent -0.6,-0.6 0.6,0.6, height 0.03
TLV757XXPDBVR [mm] "SOT23, 5-Leads, Body 2.90x2.80mm, Pitch 0.95mm, IPC Medium Density"
  rect 1.1x0.6 smd: 1(-1.3,0.95) 2(-1.3,0) 3(-1.3,-0.95) 4(1.3,-0.95) 5(1.3,0.95)
  silkscreen extent -1.42,-1.55 0.5,1.92, body extent -1.5,-1.53 1.5,1.53, height 1.45
TLV9064IDR [mm] "SOIC, 14-Leads, Body 8.65x3.90mm, Pitch 1.27mm, IPC Medium Density"
  rect 1.55x0.6 smd: 1(-2.7,3.81) 2(-2.7,2.54) 3(-2.7,1.27) 4(-2.7,0) 5(-2.7,-1.27) 6(-2.7,-2.54) 7(-2.7,-3.81) 8(2.7,-3.81) 9(2.7,-2.54) 10(2.7,-1.27) 11(2.7,0) 12(2.7,1.27) 13(2.7,2.54) 14(2.7,3.81)
  silkscreen extent -2.82,-4.4 1.6,4.78, body extent -3,-4.4 3,4.4, height 1.75
TXB0108PWR [mm] "8-Bit Bidirectional Voltage-Level Translator with Auto-Direction Sensing and ±15kV ESD Protection"
  rect 1.5x0.45 smd: 1(-2.9,2.925) 2(-2.9,2.275) 3(-2.9,1.625) 4(-2.9,0.975) 5(-2.9,0.325) 6(-2.9,-0.325) 7(-2.9,-0.975) 8(-2.9,-1.625) 9(-2.9,-2.275) 10(-2.9,-2.925) 11(2.9,-2.925) 12(2.9,-2.275) 13(2.9,-1.625) 14(2.9,-0.975) 15(2.9,-0.325) 16(2.9,0.325) 17(2.9,0.975) 18(2.9,1.625) 19(2.9,2.275) 20(2.9,2.925)
  silkscreen extent -3.02,-3.3 2.25,3.82, body extent -3.2,-3.3 3.2,3.3, height 1.2

## Part data
C1 C2 C3 C4 C5 C7 C8 C9 C10 C11 C13 C19 C21 C23 C24 C29 C32 C35 C40 C43 C47 C48 C51 C55 C70 C71: library part CAP, "25V 100nF X7R ±10% 0402 Multilayer Ceramic Capacitors MLCC - SMD/SMT ROHS", Case Code (Imperial)=0402, Case Code (Metric)=1005, Dielectric=Ceramic, Manufacturer="Samsung Electro-Mechanics", Manufacturer Part Number=CL05B104KA5NNNC, Max Operating Temperature=125°C, Min Operating Temperature=-55°C, Supplier Part Number=1276-6720-1-ND, Tolerance=10%, Voltage Rating="25 V", Voltage Rating (DC)=25V, Case/Package=0402, Category="Ceramic Capacitors", China RoHS=Compliant, ComponentLink1Description=https://datasheet.octopart.com:443/CL05B104KA5NNNC-Samsung-Electro-Mechanics-datasheet-136876160.pdf?src-supplier=Samsung+SCT, ComponentLink1URL=https://datasheet.octopart.com:443/CL05B104KA5NNNC-Samsung-Electro-Mechanics-datasheet-136876160.pdf?src-supplier=Samsung+SCT, ComponentLink2Description=https://datasheet.octopart.com:443/CL05B104KA5NNNC-Samsung-Electro-Mechanics-datasheet-116890910.pdf?src-supplier=Future+Electronics, ComponentLink2URL=https://datasheet.octopart.com:443/CL05B104KA5NNNC-Samsung-Electro-Mechanics-datasheet-116890910.pdf?src-supplier=Future+Electronics, ComponentLink3Description=https://datasheet.octopart.com:443/CL05B104KA5NNNC-Samsung-Electro-Mechanics-datasheet-104201047.pdf?src-supplier=Future+Electronics, ComponentLink3URL=https://datasheet.octopart.com:443/CL05B104KA5NNNC-Samsung-Electro-Mechanics-datasheet-104201047.pdf?src-supplier=Future+Electronics, ComponentLink4Description=https://datasheet.octopart.com:443/CL05B104KA5NNNC-Samsung-Electro-Mechanics-datasheet-148801811.pdf?src-supplier=Future+Electronics, ComponentLink4URL=https://datasheet.octopart.com:443/CL05B104KA5NNNC-Samsung-Electro-Mechanics-datasheet-148801811.pdf?src-supplier=Future+Electronics, ComponentLink5Description=https://datasheet.octopart.com/CL05B104KA5NNNC-Samsung-Electro-Mechanics-datasheet-97040617.pdf, ComponentLink5URL=https://datasheet.octopart.com/CL05B104KA5NNNC-Samsung-Electro-Mechanics-datasheet-97040617.pdf, ComponentLink6Description=https://datasheet.octopart.com/CL05B104KA5NNNC-Samsung-Electro-Mechanics-datasheet-8324245.pdf, ComponentLink6URL=https://datasheet.octopart.com/CL05B104KA5NNNC-Samsung-Electro-Mechanics-datasheet-8324245.pdf, ComponentLink7Description=https://datasheet.octopart.com/General-Multilayer-Ceramic-Capacitors-Samsung-datasheet-family-111.pdf, ComponentLink7URL=https://datasheet.octopart.com/General-Multilayer-Ceramic-Capacitors-Samsung-datasheet-family-111.pdf, ComponentLink8Description=https://datasheet.octopart.com:443/CL05B104KA5NNNC-Samsung-datasheet-8326407.pdf?src-supplier=TME, ComponentLink8URL=https://datasheet.octopart.com:443/CL05B104KA5NNNC-Samsung-datasheet-8326407.pdf?src-supplier=TME, ComponentLink9Description=http://sigma.octopart.com:80/rohs_certificate/General-Multilayer-Ceramic-Capacitors-Samsung-family-110.pdf?src-supplier=Compliance+Statements, ComponentLink9URL=http://sigma.octopart.com:80/rohs_certificate/General-Multilayer-Ceramic-Capacitors-Samsung-family-110.pdf?src-supplier=Compliance+Statements, ComponentLink10Description=http://sigma.octopart.com:80/rohs_statement/General-Multilayer-Ceramic-Capacitors-Samsung-family-132.pdf?src-supplier=Compliance+Statements, ComponentLink10URL=http://sigma.octopart.com:80/rohs_statement/General-Multilayer-Ceramic-Capacitors-Samsung-family-132.pdf?src-supplier=Compliance+Statements, ComponentLink11Description=http://sigma.octopart.com:80/reach_statement/General-Multilayer-Ceramic-Capacitors-Samsung-family-133.pdf?src-supplier=Compliance+Statements, ComponentLink11URL=http://sigma.octopart.com:80/reach_statement/General-Multilayer-Ceramic-Capacitors-Samsung-family-133.pdf?src-supplier=Compliance+Statements, Country of Origin="Mainland China, Philippines, South Korea", Dielectric Material=Ceramic, Export Control Classification Number (ECCN) Code=EAR99, Harmonized Tariff Schedule (HTS) Code=8532.24.00.20, Height=500µm, Introduction Date=2009-10-27, Length=1mm, Lifecycle Status=Production, Material=Ceramic, Mounting Technology="Surface Mount", Number of Terminals=2, Package Size=0402, Pricing="1=0.08, 10=0.002 (USD)", REACH SVHC=Yes, RoHS=Compliant, Schedule B="8532240020, 8532240020|8532240020|8532240020|8532240020|8532240020|8532240020|8532240020|8532240020|8532240020|8532240020|8532240020|8532240020|8532240020|8532240020|8532240020|8532240020|8532240020|8532240020|8532240020|8532240020|8532240020|8532240020|8532240020|85", Stock=5149468, Supplier=DigiKey, Thickness=558.8µm, Width=500µm
C6: library part CAP, "25V 1uF X7R ±10% 0603 Multilayer Ceramic Capacitors MLCC - SMD/SMT ROHS", Case Code (Imperial)=0603, Case Code (Metric)=1608, Dielectric=Ceramic, Manufacturer="Samsung Electro-Mechanics", Manufacturer Part Number=CL10B105KA8NNNC, Max Operating Temperature=125°C, Min Operating Temperature=-55°C, Supplier Part Number=1276-1184-1-ND, Tolerance=10%, Voltage=25V, Voltage Rating="25 V", Case/Package=0603, Category="Ceramic Capacitors", China RoHS=Compliant, ComponentLink1Description=https://datasheet.octopart.com:443/CL10B105KA8NNNC-Samsung-Electro-Mechanics-datasheet-182019882.pdf?src-supplier=IHS, ComponentLink1URL=https://datasheet.octopart.com:443/CL10B105KA8NNNC-Samsung-Electro-Mechanics-datasheet-182019882.pdf?src-supplier=IHS, ComponentLink2Description=https://datasheet.octopart.com:443/CL10B105KA8NNNC-Samsung-Electro-Mechanics-datasheet-106547815.pdf?src-supplier=Upverter, ComponentLink2URL=https://datasheet.octopart.com:443/CL10B105KA8NNNC-Samsung-Electro-Mechanics-datasheet-106547815.pdf?src-supplier=Upverter, ComponentLink3Description=https://datasheet.octopart.com:443/CL10B105KA8NNNC-Samsung-Electro-Mechanics-datasheet-137699931.pdf?src-supplier=Samsung+SCT, ComponentLink3URL=https://datasheet.octopart.com:443/CL10B105KA8NNNC-Samsung-Electro-Mechanics-datasheet-137699931.pdf?src-supplier=Samsung+SCT, ComponentLink4Description=https://datasheet.octopart.com:443/CL10B105KA8NNNC-Samsung-Electro-Mechanics-datasheet-116890983.pdf?src-supplier=Future+Electronics, ComponentLink4URL=https://datasheet.octopart.com:443/CL10B105KA8NNNC-Samsung-Electro-Mechanics-datasheet-116890983.pdf?src-supplier=Future+Electronics, ComponentLink5Description=https://datasheet.octopart.com:443/CL10B105KA8NNNC-Samsung-datasheet-12527851.pdf?src-supplier=Future+Electronics, ComponentLink5URL=https://datasheet.octopart.com:443/CL10B105KA8NNNC-Samsung-datasheet-12527851.pdf?src-supplier=Future+Electronics, ComponentLink6Description=https://datasheet.octopart.com:443/CL10B105KA8NNNC-Samsung-datasheet-26669022.pdf?src-supplier=Future+Electronics, ComponentLink6URL=https://datasheet.octopart.com:443/CL10B105KA8NNNC-Samsung-datasheet-26669022.pdf?src-supplier=Future+Electronics, ComponentLink7Description=https://datasheet.octopart.com:443/CL10B105KA8NNNC-Samsung-Electro-Mechanics-datasheet-149136795.pdf?src-supplier=Future+Electronics, ComponentLink7URL=https://datasheet.octopart.com:443/CL10B105KA8NNNC-Samsung-Electro-Mechanics-datasheet-149136795.pdf?src-supplier=Future+Electronics, ComponentLink8Description=https://datasheet.octopart.com:443/CL10B105KA8NNNC-Samsung-datasheet-37081328.pdf?src-supplier=Future+Electronics, ComponentLink8URL=https://datasheet.octopart.com:443/CL10B105KA8NNNC-Samsung-datasheet-37081328.pdf?src-supplier=Future+Electronics, ComponentLink9Description=https://datasheet.octopart.com/CL10B105KA8NNNC-Samsung-Electro-Mechanics-datasheet-97040617.pdf, ComponentLink9URL=https://datasheet.octopart.com/CL10B105KA8NNNC-Samsung-Electro-Mechanics-datasheet-97040617.pdf, ComponentLink10Description=https://datasheet.octopart.com/CL10B105KA8NNNC-Samsung-Electro-Mechanics-datasheet-8324245.pdf, ComponentLink10URL=https://datasheet.octopart.com/CL10B105KA8NNNC-Samsung-Electro-Mechanics-datasheet-8324245.pdf, ComponentLink11Description=https://datasheet.octopart.com:443/CL10B105KA8NNNC-Samsung-datasheet-59220082.pdf?src-supplier=TME, ComponentLink11URL=https://datasheet.octopart.com:443/CL10B105KA8NNNC-Samsung-datasheet-59220082.pdf?src-supplier=TME, ComponentLink12Description=https://datasheet.octopart.com:443/CL10B105KA8NNNC-Samsung-Electro-Mechanics-datasheet-11897796.pdf?src-supplier=Arrow+Electronics, ComponentLink12URL=https://datasheet.octopart.com:443/CL10B105KA8NNNC-Samsung-Electro-Mechanics-datasheet-11897796.pdf?src-supplier=Arrow+Electronics, Contact Plating=Tin, Country of Origin="Mainland China, Philippines, South Korea", Depth=800µm, Dielectric Material=Ceramic, Export Control Classification Number (ECCN) Code=EAR99, Harmonized Tariff Schedule (HTS) Code=8532.24.00.20, Height=900µm, Introduction Date=2009-11-02, Length=1.6mm, Lifecycle Status=Production, Material=Ceramic, Mounting Technology="Surface Mount", Number of Terminals=2, Package Size=0603, Pricing="1=0.08, 10=0.006 (USD)", Radiation Hardening=No, REACH SVHC=Yes, RoHS=Compliant, Schedule B="8532240020, 8532240020|8532240020, 8532240020|8532240020|8532240020, 8532240020|8532240020|8532240020|8532240020", Stock=1983675, Supplier=DigiKey, Thickness=889µm, Voltage Rating (DC)=25V, Width=800µm
C12 C16 C20 C22: library part CAP, "50V 10pF C0G ±5% 0402 Multilayer Ceramic Capacitors MLCC - SMD/SMT ROHS", Case Code (Imperial)=0402, Case Code (Metric)=1005, Dielectric=Ceramic, Manufacturer="Murata Electronics", Manufacturer Lifecycle Status=NRND, Manufacturer Part Number=GRM1555C1H100JA01D, Max Operating Temperature=125°C, Min Operating Temperature=-55°C, Supplier Part Number=490-5921-1-ND, Temperature Coefficient=30ppm/°C, Tolerance=5%, Voltage=50V, Voltage Rating="50 V", Case/Package=0402, Category="Ceramic Capacitors", ComponentLink1Description=https://datasheet.octopart.com:443/GRM1555C1H100JA01D-Murata-datasheet-12559435.pdf?src-supplier=element14+APAC, ComponentLink1URL=https://datasheet.octopart.com:443/GRM1555C1H100JA01D-Murata-datasheet-12559435.pdf?src-supplier=element14+APAC, ComponentLink2Description=https://datasheet.octopart.com:443/GRM1555C1H100JA01D-Murata-datasheet-62317042.pdf?src-supplier=element14+APAC, ComponentLink2URL=https://datasheet.octopart.com:443/GRM1555C1H100JA01D-Murata-datasheet-62317042.pdf?src-supplier=element14+APAC, ComponentLink3Description=https://datasheet.octopart.com:443/GRM1555C1H100JA01D-Murata-datasheet-501912.pdf?src-supplier=element14+APAC, ComponentLink3URL=https://datasheet.octopart.com:443/GRM1555C1H100JA01D-Murata-datasheet-501912.pdf?src-supplier=element14+APAC, ComponentLink4Description=https://datasheet.octopart.com:443/GRM1555C1H100JA01D-Murata-datasheet-11857477.pdf?src-supplier=_legacy+Avnet, ComponentLink4URL=https://datasheet.octopart.com:443/GRM1555C1H100JA01D-Murata-datasheet-11857477.pdf?src-supplier=_legacy+Avnet, ComponentLink5Description=https://datasheet.octopart.com:443/GRM1555C1H100JA01D-Murata-datasheet-14396362.pdf?src-supplier=Future+Electronics, ComponentLink5URL=https://datasheet.octopart.com:443/GRM1555C1H100JA01D-Murata-datasheet-14396362.pdf?src-supplier=Future+Electronics, ComponentLink6Description=https://datasheet.octopart.com:443/GRM1555C1H100JA01D-Murata-datasheet-22122223.pdf?src-supplier=Future+Electronics, ComponentLink6URL=https://datasheet.octopart.com:443/GRM1555C1H100JA01D-Murata-datasheet-22122223.pdf?src-supplier=Future+Electronics, ComponentLink7Description=https://datasheet.octopart.com:443/GRM1555C1H100JA01D-Murata-datasheet-44105796.pdf?src-supplier=Future+Electronics, ComponentLink7URL=https://datasheet.octopart.com:443/GRM1555C1H100JA01D-Murata-datasheet-44105796.pdf?src-supplier=Future+Electronics, ComponentLink8Description=https://datasheet.octopart.com:443/GRM1555C1H100JA01D-Murata-datasheet-165579666.pdf?src-supplier=TME, ComponentLink8URL=https://datasheet.octopart.com:443/GRM1555C1H100JA01D-Murata-datasheet-165579666.pdf?src-supplier=TME, ComponentLink9Description=https://datasheet.octopart.com:443/GRM1555C1H100JA01D-Murata-datasheet-59876780.pdf?src-supplier=TME, ComponentLink9URL=https://datasheet.octopart.com:443/GRM1555C1H100JA01D-Murata-datasheet-59876780.pdf?src-supplier=TME, ComponentLink10Description=https://datasheet.octopart.com:443/GRM1555C1H100JA01D-Murata-datasheet-141266224.pdf?src-supplier=Ciiva, ComponentLink10URL=https://datasheet.octopart.com:443/GRM1555C1H100JA01D-Murata-datasheet-141266224.pdf?src-supplier=Ciiva, ComponentLink11Description=https://datasheet.octopart.com:443/GRM1555C1H100JA01D-Murata-datasheet-140680755.pdf?src-supplier=Ciiva, ComponentLink11URL=https://datasheet.octopart.com:443/GRM1555C1H100JA01D-Murata-datasheet-140680755.pdf?src-supplier=Ciiva, ComponentLink12Description=https://datasheet.octopart.com:443/GRM1555C1H100JA01D-Murata-datasheet-138739439.pdf?src-supplier=Ciiva, ComponentLink12URL=https://datasheet.octopart.com:443/GRM1555C1H100JA01D-Murata-datasheet-138739439.pdf?src-supplier=Ciiva, ComponentLink13Description=https://datasheet.octopart.com/GRM1555C1H100JA01D-Murata-datasheet-12515295.pdf, ComponentLink13URL=https://datasheet.octopart.com/GRM1555C1H100JA01D-Murata-datasheet-12515295.pdf, ComponentLink14Description=https://datasheet.octopart.com/GRM1555C1H100JA01D-Murata-datasheet-12510076.pdf, ComponentLink14URL=https://datasheet.octopart.com/GRM1555C1H100JA01D-Murata-datasheet-12510076.pdf, ComponentLink15Description=https://datasheet.octopart.com/GRM1555C1H100JA01D-Murata-datasheet-11978611.pdf, ComponentLink15URL=https://datasheet.octopart.com/GRM1555C1H100JA01D-Murata-datasheet-11978611.pdf, ComponentLink16Description=https://datasheet.octopart.com/GRM1555C1H100JA01D-Murata-datasheet-10025737.pdf, ComponentLink16URL=https://datasheet.octopart.com/GRM1555C1H100JA01D-Murata-datasheet-10025737.pdf, ComponentLink17Description=https://datasheet.octopart.com/GRM1555C1H100JA01D-Murata-datasheet-8819587.pdf, ComponentLink17URL=https://datasheet.octopart.com/GRM1555C1H100JA01D-Murata-datasheet-8819587.pdf, ComponentLink18Description=http://sigma.octopart.com:80/reach_statement/Murata-company-16.pdf?src-supplier=Compliance+Statements, ComponentLink18URL=http://sigma.octopart.com:80/reach_statement/Murata-company-16.pdf?src-supplier=Compliance+Statements, Country of Origin=Singapore, Depth=500µm, Dielectric Material=Ceramic, Export Control Classification Number (ECCN) Code=EAR99, Harmonized Tariff Schedule (HTS) Code=8532.24.00.20, Height=500µm, Introduction Date=2003-10-14, Lead Free="Lead Free", Length=1mm, Lifecycle Status=NRND, Material=Ceramic, Mounting Technology="Surface Mount", Number of Terminals=2, Package Size=0402, Packaging="Cut Tape", Pins=2, Pricing="1=0.1, 10=0.022, 50=0.0144, 100=0.0122, 500=0.0085, 1000=0.00738, 2500=0.0062, 5000=0.0055, 10000=0.00503, 20000=0.00454, 30000=0.0043, 50000=0.00404, 70000=0.00388, 100000=0.00373, 120000=0.00366, 240000=0.00342, 250000=0.00341 (USD)", Radiation Hardening=No, REACH SVHC=Yes, RoHS=Compliant, Schedule B="8532240020, 8532240020|8532240020, 8532240020|8532240020|8532240020, 8532240020|8532240020|8532240020|8532240020", Stock=712856, Supplier=DigiKey, Termination=SMD/SMT, Thickness=500µm, Voltage Rating (DC)=50V, Width=500µm
C14 C15 C30 C33 C36 C41 C44 C49 C52 C56: library part CAP, "50V 1nF X7R ±10% 0402 Multilayer Ceramic Capacitors MLCC - SMD/SMT ROHS", Case Code (Imperial)=0402, Case Code (Metric)=1005, Dielectric=Ceramic, Insulation Resistance=100GΩ, Manufacturer=Yageo, Manufacturer Part Number=CC0402KRX7R9BB102, Max Operating Temperature=125°C, Min Operating Temperature=-55°C, Supplier Part Number=311-1036-1-ND, Temperature Coefficient=30ppm/°C, Tolerance=10%, Voltage=50V, Voltage Rating="50 V", Case/Package=0402, Category="Ceramic Capacitors", China RoHS=Compliant, ComponentLink1Description=https://datasheet.octopart.com:443/CC0402KRX7R9BB102-Yageo-datasheet-177165144.pdf?src-supplier=IHS, ComponentLink1URL=https://datasheet.octopart.com:443/CC0402KRX7R9BB102-Yageo-datasheet-177165144.pdf?src-supplier=IHS, ComponentLink2Description=https://datasheet.octopart.com:443/CC0402KRX7R9BB102-Yageo-datasheet-82288757.pdf?src-supplier=Upverter, ComponentLink2URL=https://datasheet.octopart.com:443/CC0402KRX7R9BB102-Yageo-datasheet-82288757.pdf?src-supplier=Upverter, ComponentLink3Description=https://datasheet.octopart.com:443/CC0402KRX7R9BB102-Yageo-datasheet-78855684.pdf?src-supplier=Upverter, ComponentLink3URL=https://datasheet.octopart.com:443/CC0402KRX7R9BB102-Yageo-datasheet-78855684.pdf?src-supplier=Upverter, ComponentLink4Description=https://datasheet.octopart.com/CC0402KRX7R9BB102-Yageo-datasheet-10883670.pdf, ComponentLink4URL=https://datasheet.octopart.com/CC0402KRX7R9BB102-Yageo-datasheet-10883670.pdf, ComponentLink5Description=https://datasheet.octopart.com/CC0402KRX7R9BB102-Yageo-datasheet-12526321.pdf, ComponentLink5URL=https://datasheet.octopart.com/CC0402KRX7R9BB102-Yageo-datasheet-12526321.pdf, ComponentLink6Description=https://datasheet.octopart.com:443/CC0402KRX7R9BB102-Yageo-datasheet-147453679.pdf?src-supplier=Farnell, ComponentLink6URL=https://datasheet.octopart.com:443/CC0402KRX7R9BB102-Yageo-datasheet-147453679.pdf?src-supplier=Farnell, ComponentLink7Description=https://datasheet.octopart.com:443/CC0402KRX7R9BB102-Yageo-datasheet-151948686.pdf?src-supplier=Farnell, ComponentLink7URL=https://datasheet.octopart.com:443/CC0402KRX7R9BB102-Yageo-datasheet-151948686.pdf?src-supplier=Farnell, ComponentLink8Description=https://datasheet.octopart.com:443/CC0402KRX7R9BB102-Phycomp-datasheet-500777.pdf?src-supplier=Farnell, ComponentLink8URL=https://datasheet.octopart.com:443/CC0402KRX7R9BB102-Phycomp-datasheet-500777.pdf?src-supplier=Farnell, ComponentLink9Description=https://datasheet.octopart.com:443/CC0402KRX7R9BB102-Yageo-datasheet-5301394.pdf?src-supplier=Newark, ComponentLink9URL=https://datasheet.octopart.com:443/CC0402KRX7R9BB102-Yageo-datasheet-5301394.pdf?src-supplier=Newark, ComponentLink10Description=https://datasheet.octopart.com:443/CC0402KRX7R9BB102-Yageo-datasheet-62336348.pdf?src-supplier=Newark, ComponentLink10URL=https://datasheet.octopart.com:443/CC0402KRX7R9BB102-Yageo-datasheet-62336348.pdf?src-supplier=Newark, ComponentLink11Description=https://datasheet.octopart.com:443/CC0402KRX7R9BB102-Yageo-datasheet-182878162.pdf?src-supplier=Newark, ComponentLink11URL=https://datasheet.octopart.com:443/CC0402KRX7R9BB102-Yageo-datasheet-182878162.pdf?src-supplier=Newark, ComponentLink12Description=https://datasheet.octopart.com:443/CC0402KRX7R9BB102-Phycomp-datasheet-499490.pdf?src-supplier=element14, ComponentLink12URL=https://datasheet.octopart.com:443/CC0402KRX7R9BB102-Phycomp-datasheet-499490.pdf?src-supplier=element14, ComponentLink13Description=https://datasheet.octopart.com:443/CC0402KRX7R9BB102-Yageo-datasheet-8701427.pdf?src-supplier=element14, ComponentLink13URL=https://datasheet.octopart.com:443/CC0402KRX7R9BB102-Yageo-datasheet-8701427.pdf?src-supplier=element14, ComponentLink14Description=https://datasheet.octopart.com:443/CC0402KRX7R9BB102-Yageo-datasheet-166511530.pdf?src-supplier=Future+Electronics, ComponentLink14URL=https://datasheet.octopart.com:443/CC0402KRX7R9BB102-Yageo-datasheet-166511530.pdf?src-supplier=Future+Electronics, ComponentLink15Description=https://datasheet.octopart.com:443/CC0402KRX7R9BB102-Yageo-datasheet-137700082.pdf?src-supplier=Future+Electronics, ComponentLink15URL=https://datasheet.octopart.com:443/CC0402KRX7R9BB102-Yageo-datasheet-137700082.pdf?src-supplier=Future+Electronics, ComponentLink16Description=https://datasheet.octopart.com:443/CC0402KRX7R9BB102-Yageo-datasheet-137700084.pdf?src-supplier=Future+Electronics, ComponentLink16URL=https://datasheet.octopart.com:443/CC0402KRX7R9BB102-Yageo-datasheet-137700084.pdf?src-supplier=Future+Electronics, ComponentLink17Description=https://datasheet.octopart.com:443/CC0402KRX7R9BB102-Yageo-datasheet-78855685.pdf?src-supplier=Future+Electronics, ComponentLink17URL=https://datasheet.octopart.com:443/CC0402KRX7R9BB102-Yageo-datasheet-78855685.pdf?src-supplier=Future+Electronics, ComponentLink18Description=https://datasheet.octopart.com:443/CC0402KRX7R9BB102-Yageo-datasheet-27626582.pdf?src-supplier=Future+Electronics, ComponentLink18URL=https://datasheet.octopart.com:443/CC0402KRX7R9BB102-Yageo-datasheet-27626582.pdf?src-supplier=Future+Electronics, ComponentLink19Description=https://datasheet.octopart.com:443/CC0402KRX7R9BB102-Yageo-datasheet-24578986.pdf?src-supplier=Future+Electronics, ComponentLink19URL=https://datasheet.octopart.com:443/CC0402KRX7R9BB102-Yageo-datasheet-24578986.pdf?src-supplier=Future+Electronics, ComponentLink20Description=https://datasheet.octopart.com:443/CC0402KRX7R9BB102-Yageo-datasheet-15895757.pdf?src-supplier=Future+Electronics, ComponentLink20URL=https://datasheet.octopart.com:443/CC0402KRX7R9BB102-Yageo-datasheet-15895757.pdf?src-supplier=Future+Electronics, ComponentLink21Description=https://datasheet.octopart.com:443/CC0402KRX7R9BB102-Yageo-datasheet-8324192.pdf?src-supplier=Future+Electronics, ComponentLink21URL=https://datasheet.octopart.com:443/CC0402KRX7R9BB102-Yageo-datasheet-8324192.pdf?src-supplier=Future+Electronics, ComponentLink22Description=https://datasheet.octopart.com:443/CC0402KRX7R9BB102-Yageo-datasheet-68298032.pdf?src-supplier=Future+Electronics, ComponentLink22URL=https://datasheet.octopart.com:443/CC0402KRX7R9BB102-Yageo-datasheet-68298032.pdf?src-supplier=Future+Electronics, ComponentLink23Description=https://datasheet.octopart.com:443/CC0402KRX7R9BB102-Yageo-datasheet-178018854.pdf?src-supplier=Burklin+Elektronik, ComponentLink23URL=https://datasheet.octopart.com:443/CC0402KRX7R9BB102-Yageo-datasheet-178018854.pdf?src-supplier=Burklin+Elektronik, ComponentLink24Description=https://datasheet.octopart.com:443/CC0402KRX7R9BB102-Yageo-Group-datasheet-165992755.pdf?src-supplier=ODG+(Origin+Data+Global), ComponentLink24URL=https://datasheet.octopart.com:443/CC0402KRX7R9BB102-Yageo-Group-datasheet-165992755.pdf?src-supplier=ODG+(Origin+Data+Global), ComponentLink25Description=https://datasheet.octopart.com:443/CC0402KRX7R9BB102-Yageo-datasheet-120101875.pdf?src-supplier=Megastar, ComponentLink25URL=https://datasheet.octopart.com:443/CC0402KRX7R9BB102-Yageo-datasheet-120101875.pdf?src-supplier=Megastar, ComponentLink26Description=https://datasheet.octopart.com:443/CC0402KRX7R9BB102-Yageo-datasheet-118396.pdf?src-supplier=DigiKey, ComponentLink26URL=https://datasheet.octopart.com:443/CC0402KRX7R9BB102-Yageo-datasheet-118396.pdf?src-supplier=DigiKey, ComponentLink27Description=http://sigma.octopart.com:80/rohs_statement/Surface-Mount-Ceramic-Multilayer-Capacitors%3B-General-Purpose-%26-High-Capacitance-Class-2%2C-X7R-Yageo-family-124.pdf?src-supplier=Compliance+Statements, ComponentLink27URL=http://sigma.octopart.com:80/rohs_statement/Surface-Mount-Ceramic-Multilayer-Capacitors%3B-General-Purpose-%26-High-Capacitance-Class-2%2C-X7R-Yageo-family-124.pdf?src-supplier=Compliance+Statements, ComponentLink28Description=http://sigma.octopart.com:80/reach_statement/Surface-Mount-Ceramic-Multilayer-Capacitors%3B-General-Purpose-%26-High-Capacitance-Class-2%2C-X7R-Yageo-family-125.pdf?src-supplier=Compliance+Statements, ComponentLink28URL=http://sigma.octopart.com:80/reach_statement/Surface-Mount-Ceramic-Multilayer-Capacitors%3B-General-Purpose-%26-High-Capacitance-Class-2%2C-X7R-Yageo-family-125.pdf?src-supplier=Compliance+Statements, ComponentLink29Description=http://sigma.octopart.com:80/conflict_mineral_statement/Yageo-company-3.pdf?src-supplier=Compliance+Statements, ComponentLink29URL=http://sigma.octopart.com:80/conflict_mineral_statement/Yageo-company-3.pdf?src-supplier=Compliance+Statements, ComponentLink30Description=http://sigma.octopart.com:80/rohs_statement/Yageo-company-2.pdf?src-supplier=Compliance+Statements, ComponentLink30URL=http://sigma.octopart.com:80/rohs_statement/Yageo-company-2.pdf?src-supplier=Compliance+Statements, Composition=Ceramic, Country of Origin="Mainland China, Taiwan", Depth=500µm, Dielectric Material=Ceramic, Export Control Classification Number (ECCN) Code=EAR99, Halogen Free="Halogen Free", Harmonized Tariff Schedule (HTS) Code=8532.24.00.20, Height=500µm, Introduction Date=2003-01-27, Lead Free="Lead Free", Length=1mm, Lifecycle Status=Production, Material=Ceramic, Mounting Technology="Surface Mount", Number of Terminals=2, Package Size=0402, Pins=2, Pricing="1=0.08, 10=0.003, 10000=0.0024 (USD)", Radiation Hardening=No, REACH SVHC=Yes, RoHS=Compliant, Schedule B="8532240020, 8532240020|8532240020|8532240020|8532240020|8532240020|8532240020|8532240020|8532240020|8532240020|8532240020|8532240020|8532240020|8532240020|8532240020|8532240020|8532240020|8532240020|8532240020|8532240020|8532240020|8532240020|8532240020|8532240020|85", Stock=1584347, Supplier=DigiKey, Termination=SMD/SMT, Thickness=558.8µm, Voltage Rating (AC)=50V, Voltage Rating (DC)=50V, Width=500µm